# Altium PCB DZ_V5.1.PcbDoc (part 1 of 2)
Units mm, origin at the board's own origin, x right, y up, seen from the top; angles counter-clockwise.
Board outline 105.4 x 126 mm, 4 copper layers (Top Layer, TOP, Mid-Layer 1, INT1, Mid-Layer 2, INT2, Bottom Layer, Bottom); 225 components, 158 nets, 762 pads, 182 vias.
Unrouted connection lines stored in the file: 2.
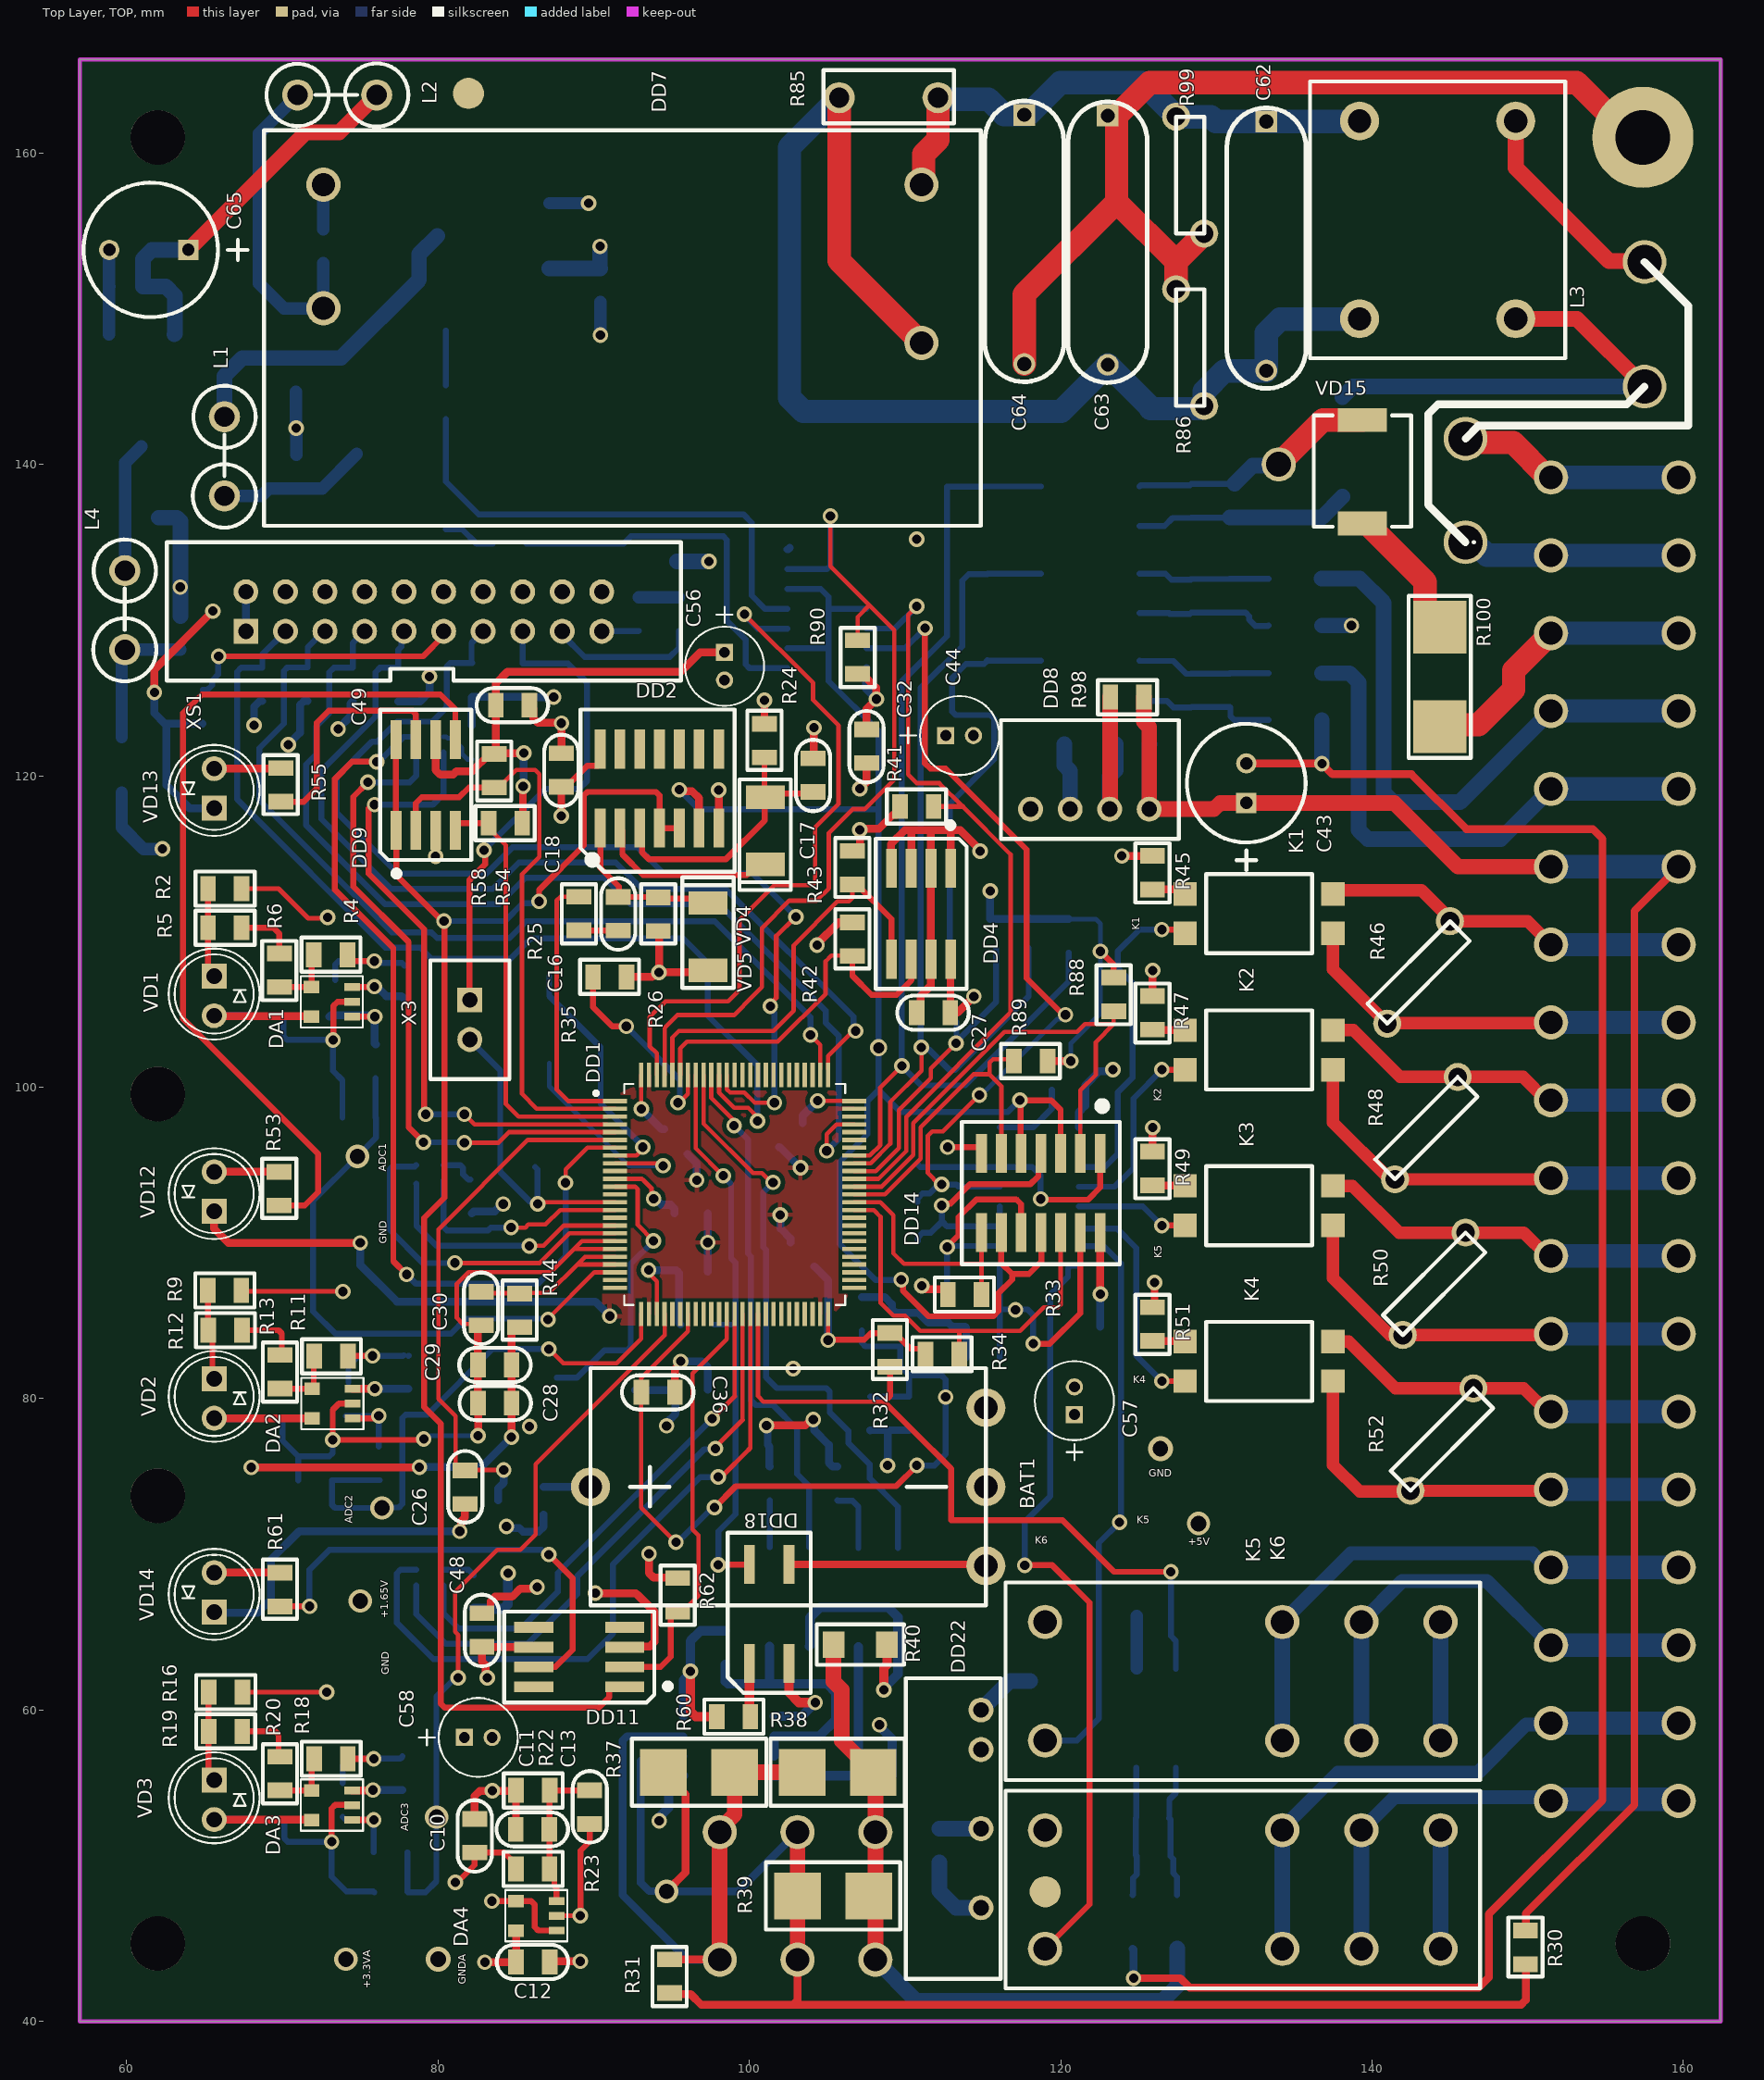
[diagram p0: Top Layer, TOP view]
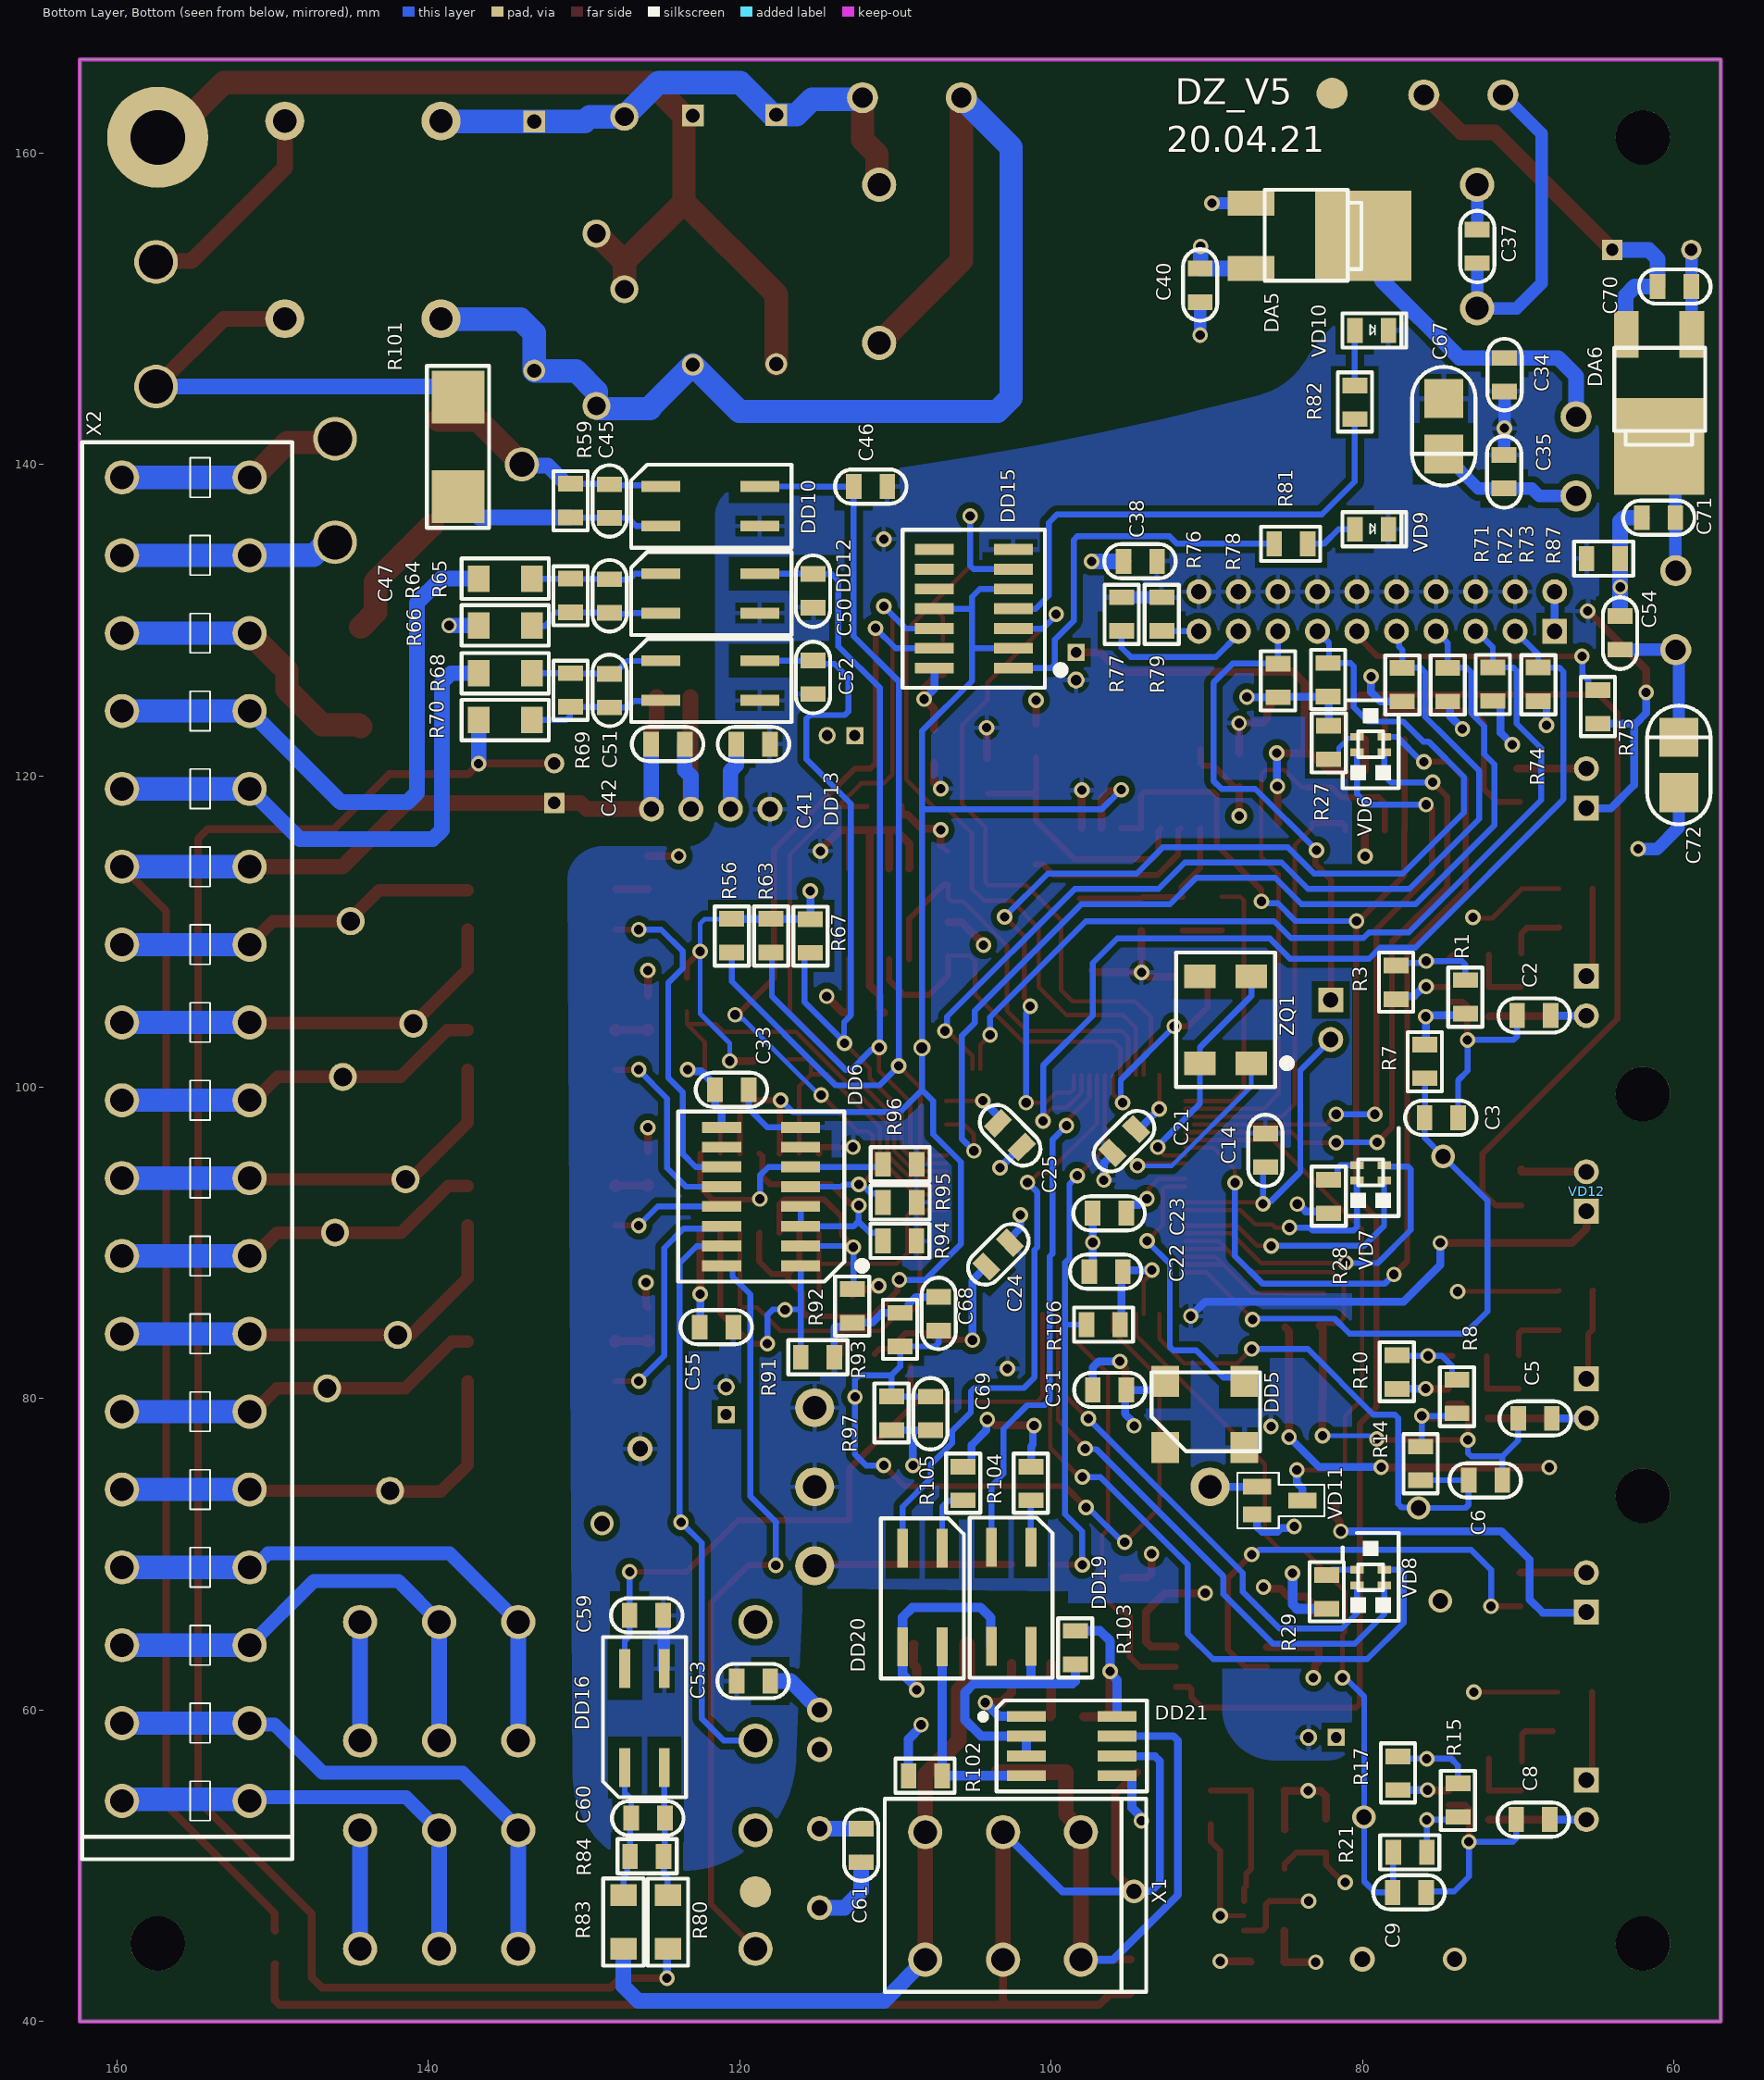
[diagram p1: Bottom Layer, Bottom view, seen from below]
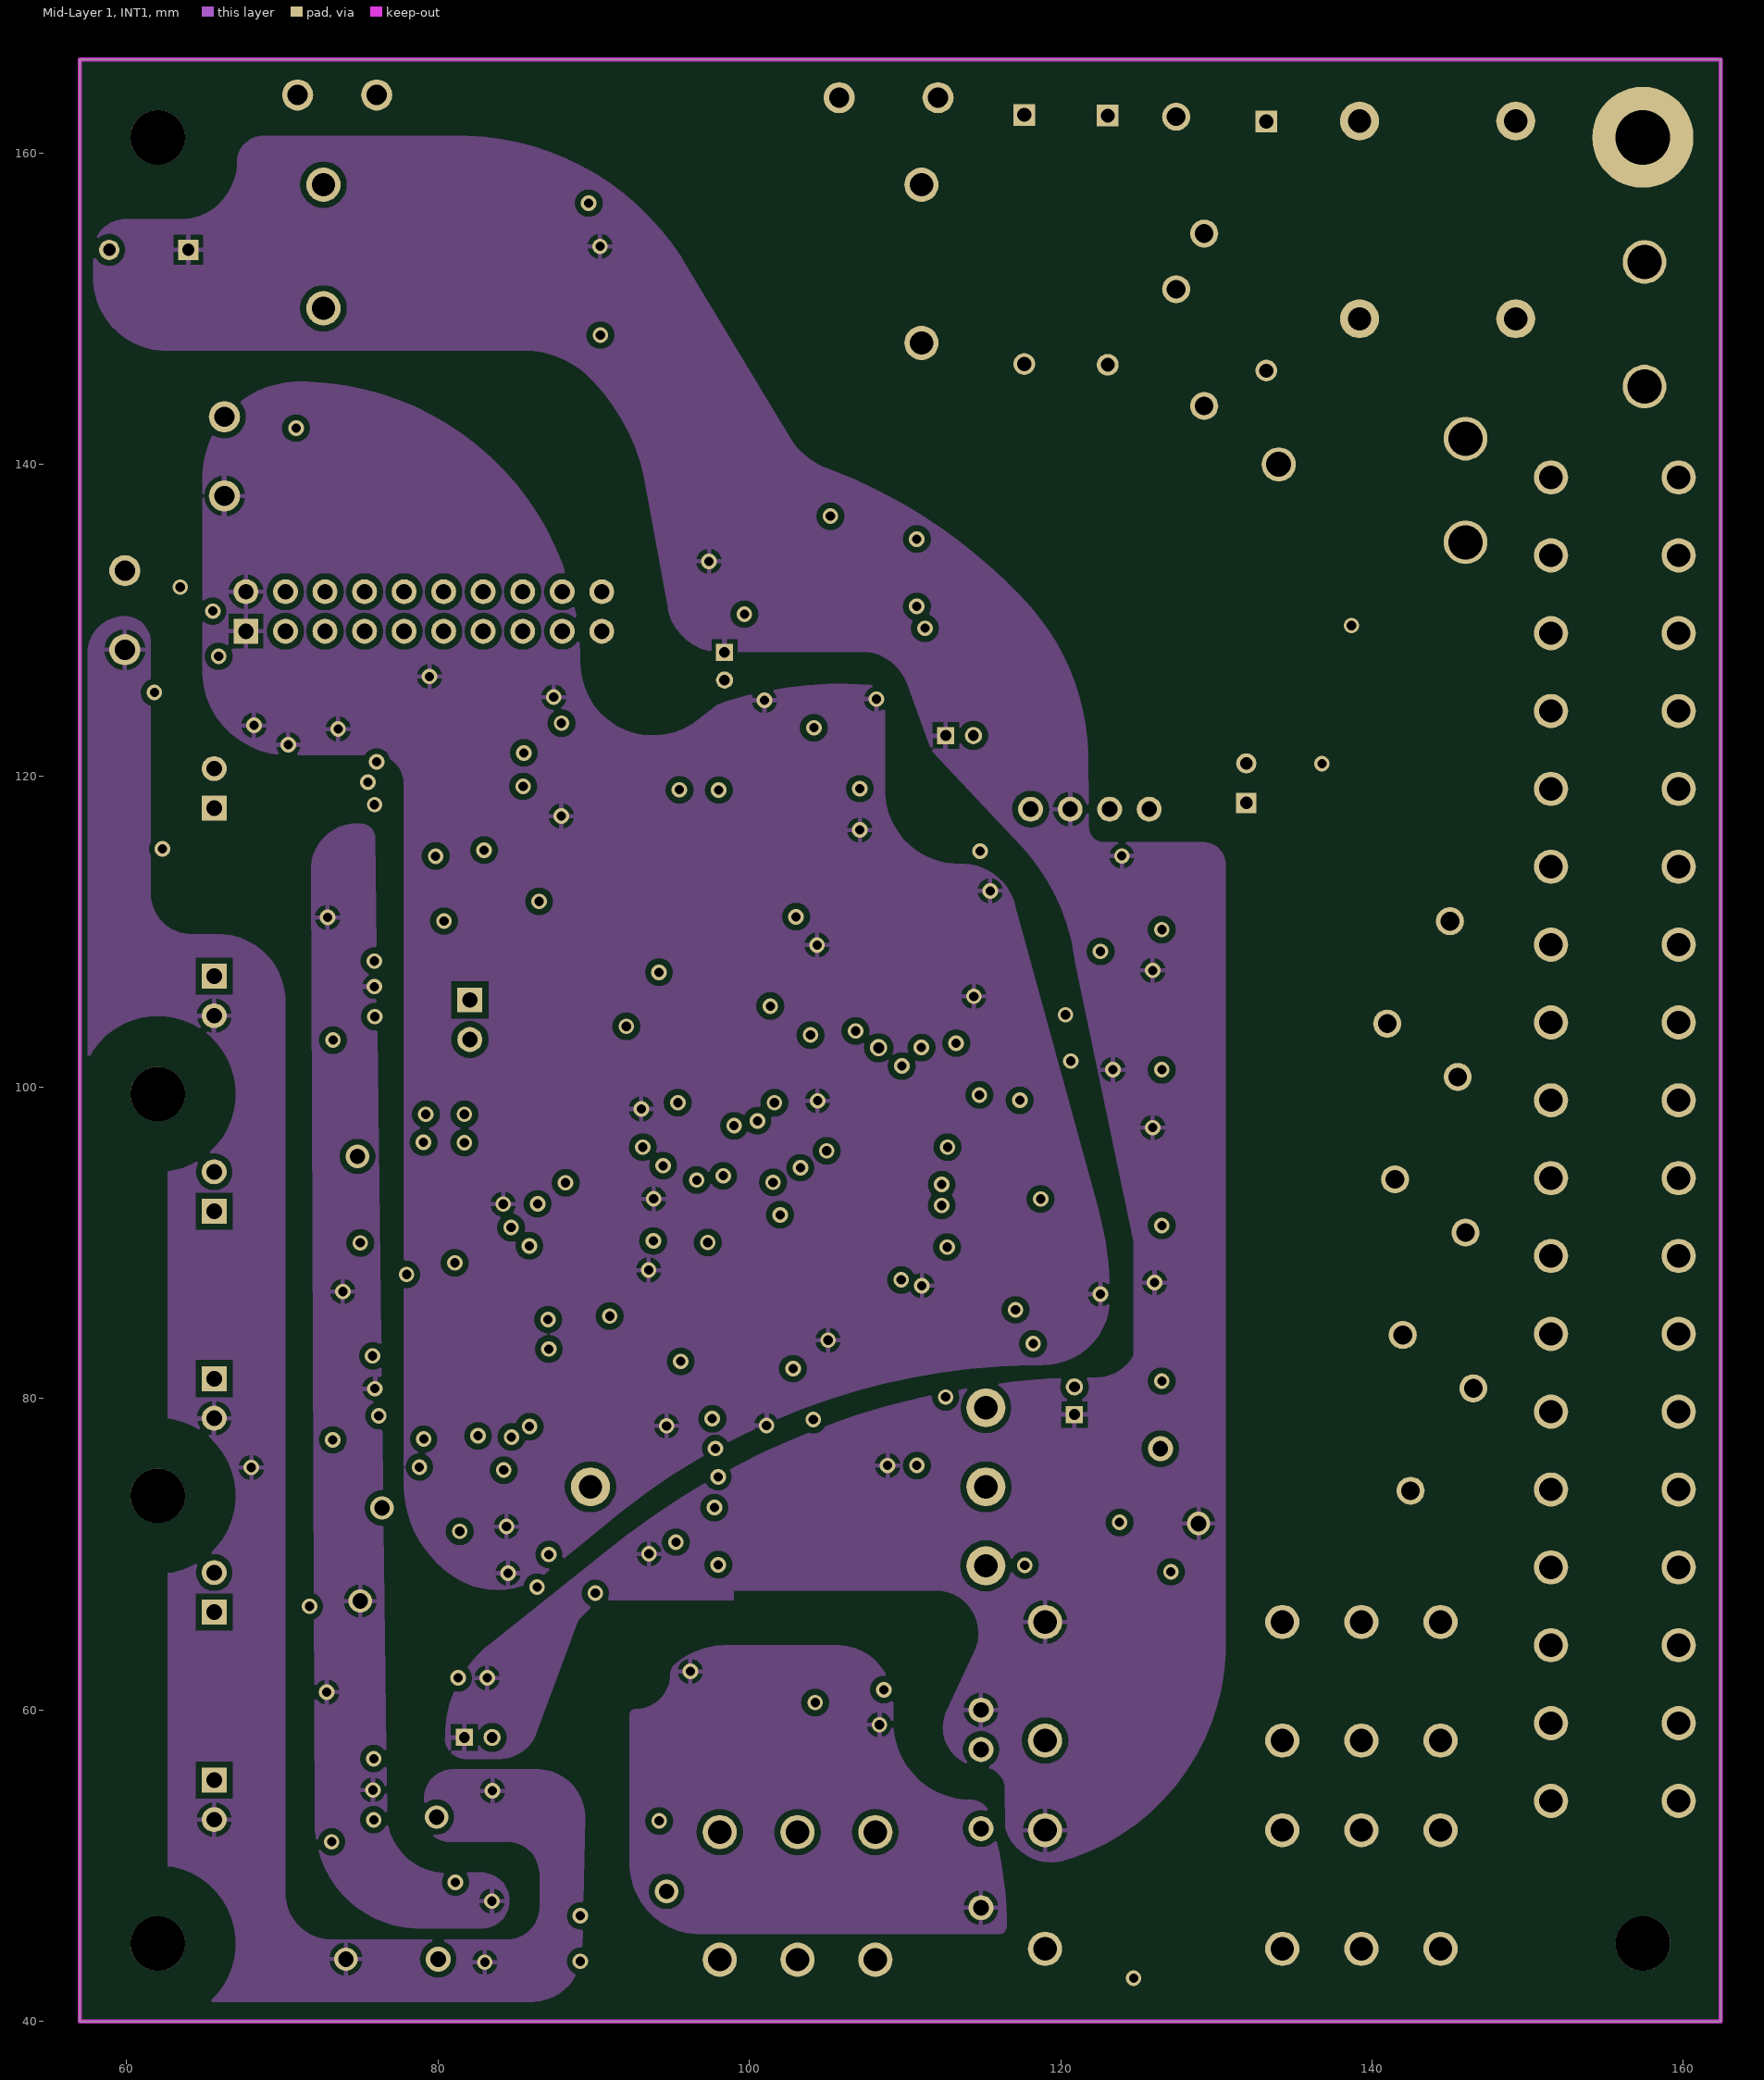
[diagram p2: Mid-Layer 1, INT1]
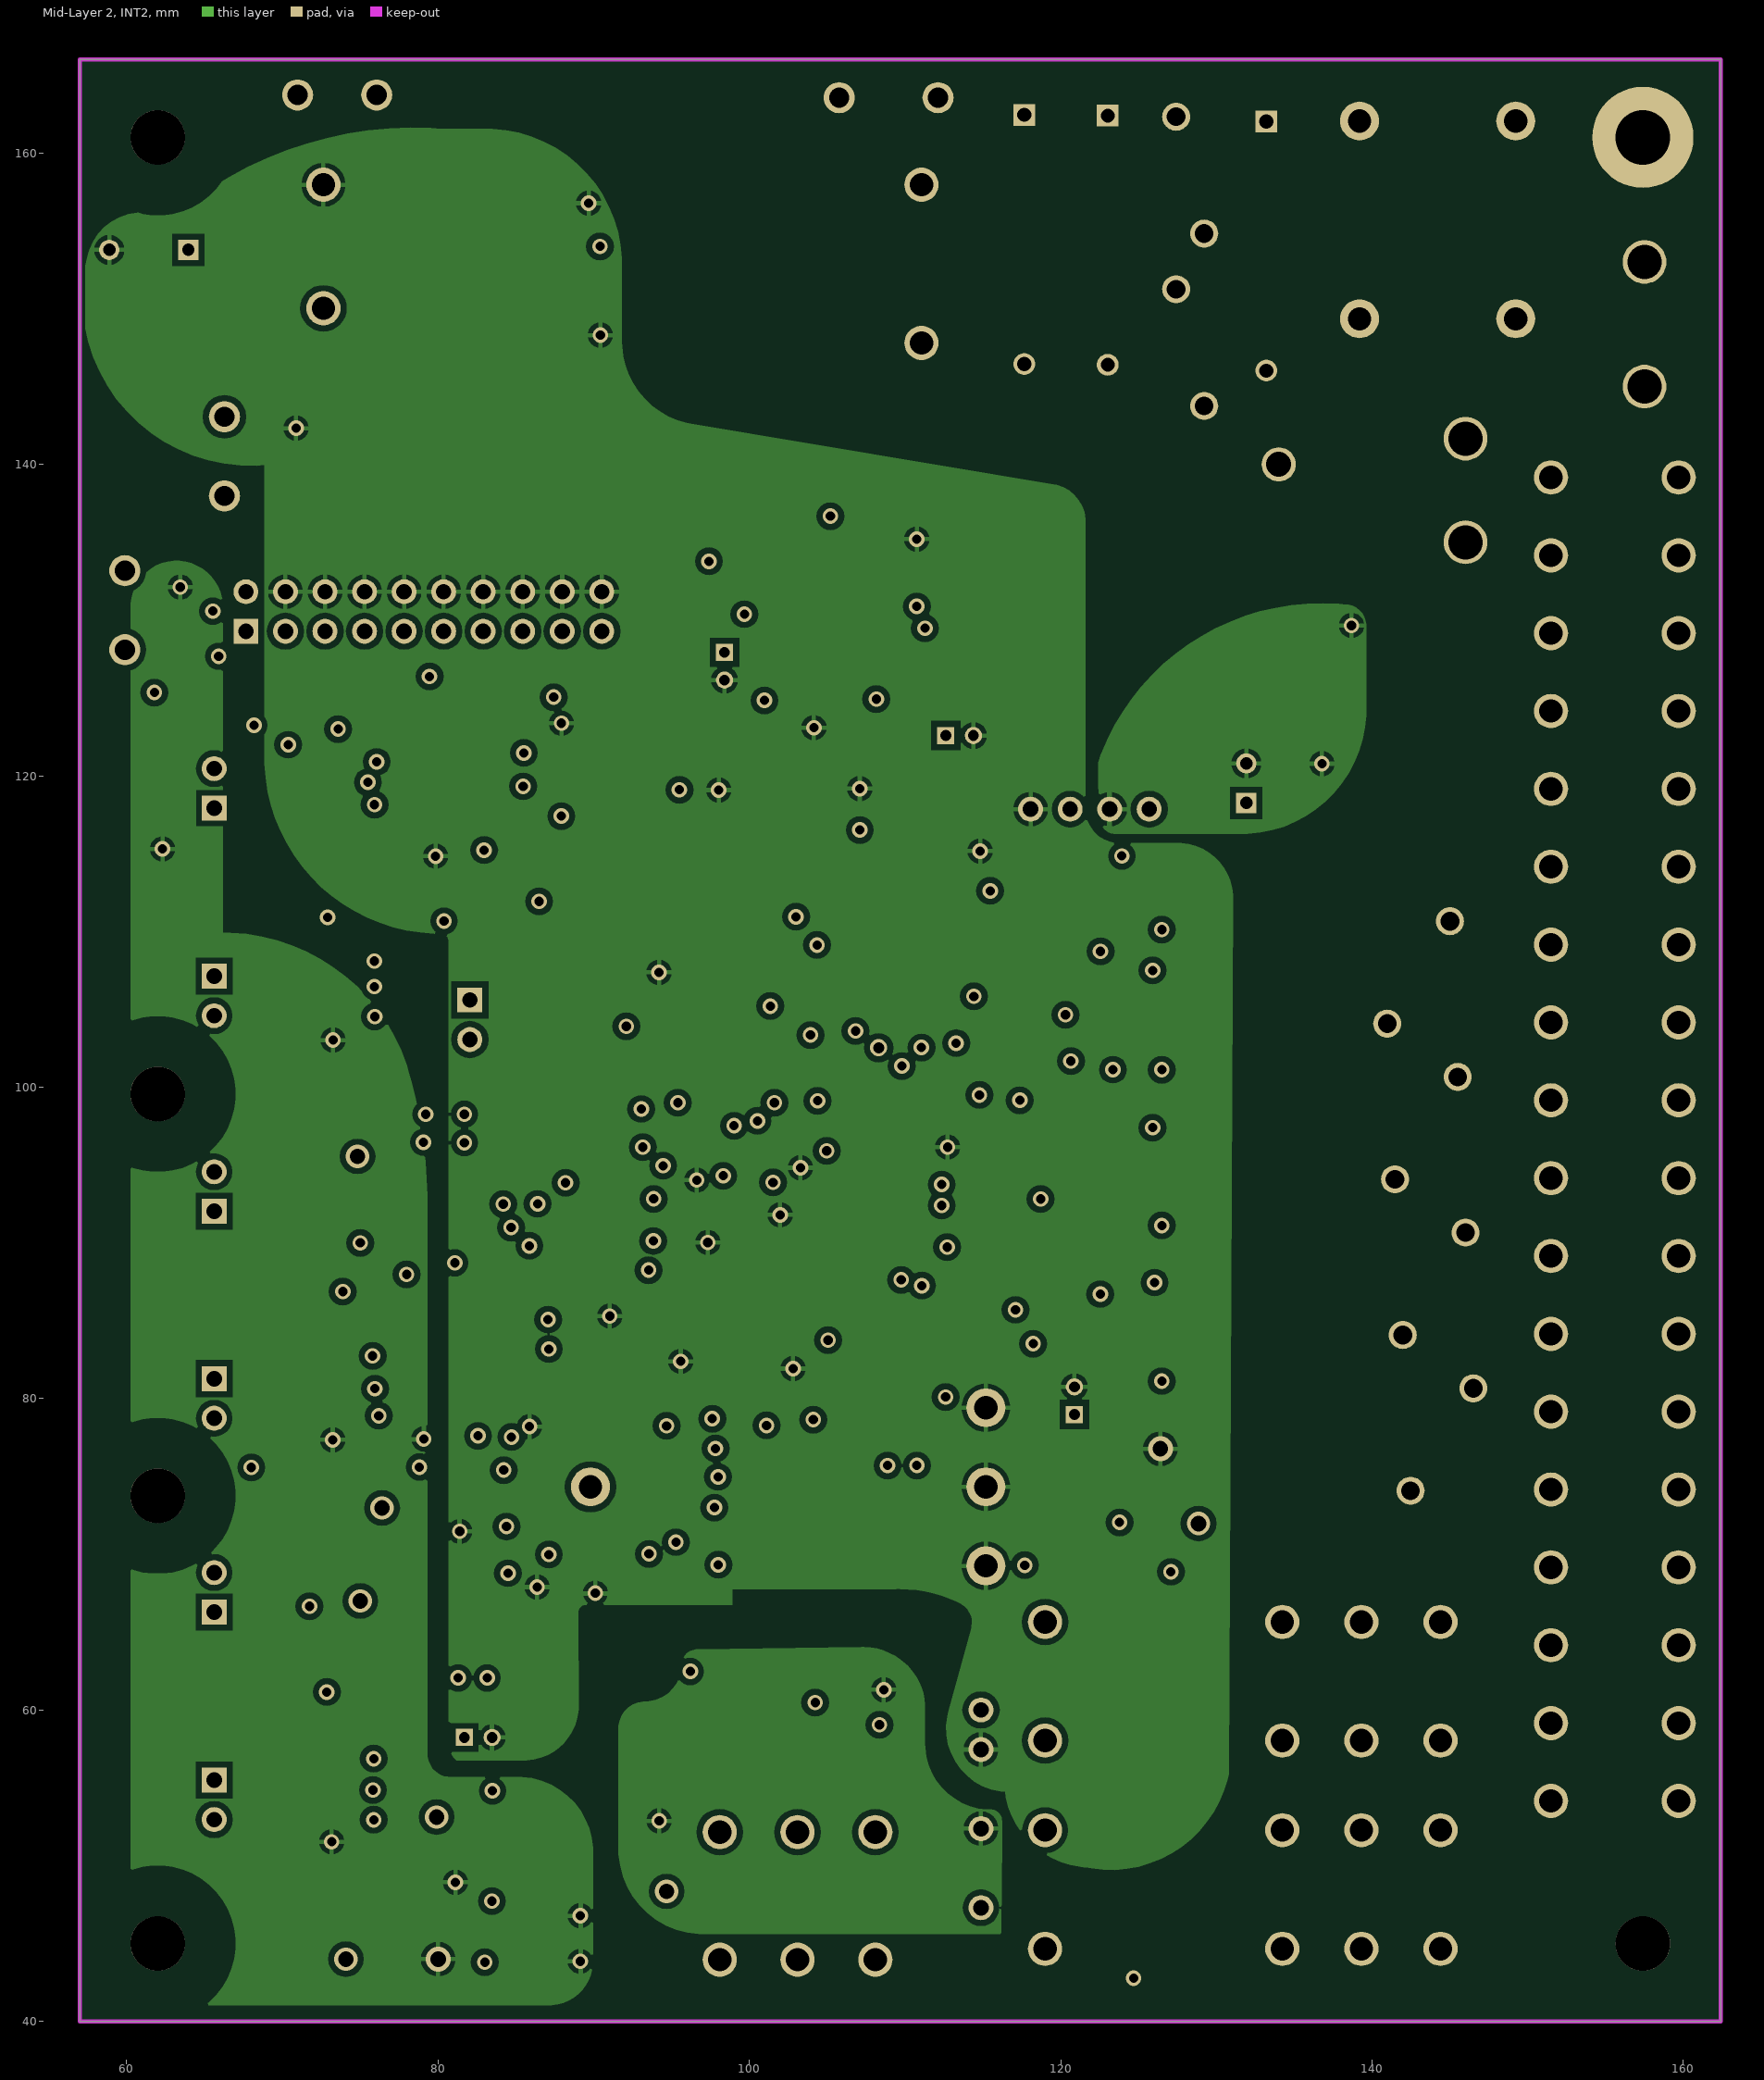
[diagram p3: Mid-Layer 2, INT2]

## Layer stack, top to bottom
Top Solder, Top Mask: solder mask 0.0102, Solder Resist, Dk 3.5
Top Layer, TOP: signal copper 0.0356
Dielectric 1: dielectric 0.32, FR-4, Dk 4.8
Mid-Layer 1, INT1: signal copper 0.0356
Dielectric2: dielectric 0.32, FR-4, Dk 4.8
Mid-Layer 2, INT2: signal copper 0.0356
Dielectric3: dielectric 0.32, FR-4, Dk 4.8
Bottom Layer, Bottom: signal copper 0.0356
Bottom Solder, Bot Mask: solder mask 0.0102, Solder Resist, Dk 3.5

## Board outline
56.99,40 56.99,166 162.39,166 162.39,40

## Design rules (kind name [scope] priority, off if disabled: settings)
Clearance MidL [OnLayer('Mid-Layer 2, INT2')] p1: gap=0.381 ignorepadtopadclearanceinfootprint=FALSE except(0.22: Arc-Fill Arc-Poly Arc-Region Track-Fill Track-Poly Track-Region; 0.229: SMDPad-Fill SMDPad-Poly SMDPad-Region)
Clearance MidG [OnLayer('Mid-Layer 1, INT1')] p2: gap=0.381 ignorepadtopadclearanceinfootprint=FALSE except(0.22: Arc-Fill Arc-Poly Arc-Region Track-Fill Track-Poly Track-Region; 0.229: SMDPad-Fill SMDPad-Poly SMDPad-Region)
Clearance Bottom [OnLayer('Bottom Layer, Bottom')] p3: gap=0.4 ignorepadtopadclearanceinfootprint=FALSE except(0.35: Fill-Fill Fill-Poly Fill-Region Poly-Poly Poly-Region Region-Region; 0.6: Arc-Arc Arc-Track Track-Track; 0.75: SMDPad-Fill SMDPad-Poly SMDPad-Region)
Clearance Top [OnLayer('Top Layer, TOP')] p4: gap=0.4 ignorepadtopadclearanceinfootprint=FALSE except(0.2: Arc-Fill Arc-Poly Arc-Region Track-Fill Track-Poly Track-Region; 0.25: SMDPad-Fill SMDPad-Poly SMDPad-Region; 0.3: Via-Fill Via-Poly Via-Region Fill-Fill Fill-Poly Fill-Region Poly-Poly Poly-Region Region-Region; 0.6: Arc-Arc Arc-Track Track-Track)
ComponentClearance [All] p1: gap=0 collisioncheckmode=3 verticalgap=0 showdistances=FALSE
PlaneClearance [All] p1: clearance=0.5
PolygonConnect [All] p1: connectstyle=Relief reliefconductorwidth=0.3 reliefentries=4 polygonreliefangle="90 Angle" airgapwidth=0.3
RoutingVias [All] p1: holewidth=0.6 width=1 viastyle="Through Hole" minholewidth=0 minwidth=0 maxholewidth=1.6 maxwidth=2
SolderMaskExpansion [All] p1: expansion=0.102 istentingtop=FALSE
Width [All] p1: maxlimit=2 minlimit=0.2 preferedwidth=0.3
28 further rules are at their usual default settings.

## Components (designator, comment, footprint, x,y, rotation, side; value= is the part's Value field where it differs from the comment)
BAT1 "ER14250-VY_BATT" ER14250-VY_BATT_ER14250-VY_B09_ER14250-VY_BATT_ER14250-VY_B09(Primary) 89.789,74.334 r0 top
C2 "CAP_0805" CAP_0805 70.069,104.599 r180 bottom
C3 "CAP_0805" CAP_0805 73.856,98.034 r0 bottom
C5 "CAP_0805" CAP_0805 69.999,78.729 r180 bottom
C6 "CAP_0805" CAP_0805 71.016,74.75 r0 bottom
C8 "CAP_0805" CAP_0805 70.125,52.959 r180 bottom
C9 "CAP_0805" CAP_0805 75.906,48.284 r0 bottom
C10 "CAP_0805" CAP_0805 82.35,53.009 r270 top
C11 "CAP_0805" CAP_0805 87.149,52.334 r180 top
C12 "CAP_0805" CAP_0805 87.17,43.814 r180 top
C13 "CAP_0805" CAP_0805 89.74,52.675 r90 top
C14 "CAP_0805" CAP_0805 86.233,97.028 r270 bottom
C16 "CAP_0805" CAP_0805 91.566,112.218 r270 top
C17 "CAP_0805" CAP_0805 104.09,121.118 r270 top
C18 "CAP_0805" CAP_0805 87.915,121.443 r270 top
C21 "CAP_0805" CAP_0805 94.54,97.309 r315 bottom
C22 "CAP_0805" CAP_0805 95.391,88.15 r0 bottom
C23 "CAP_0805" CAP_0805 95.175,91.9 r0 bottom
C24 "CAP_0805" CAP_0805 104.166,88.482 r135 bottom
C25 "CAP_0805" CAP_0805 103.415,97.684 r225 bottom
C26 "CAP_0805" CAP_0805 81.74,73.234 r90 top
C27 "CAP_0805" CAP_0805 112.898,104.784 r180 top
C28 "CAP_0805" CAP_0805 82.565,79.709 r0 top
C29 "CAP_0805" CAP_0805 82.556,82.159 r0 top
C30 "CAP_0805" CAP_0805 82.765,84.7 r90 top
C31 "CAP_0805" CAP_0805 97.324,80.559 r180 bottom
C32 "CAP_0805" CAP_0805 107.525,122.975 r270 top
C33 "CAP_0805" CAP_0805 119.431,99.834 r0 bottom
C34 "CAP_0805" CAP_0805 70.875,144.675 r90 bottom
C35 "CAP_0805" CAP_0805 70.9,140.613 r270 bottom
C36 "CAP_0805" CAP_0805 95.209,80.4 r180 top
C37 "CAP_0805" CAP_0805 72.625,155.084 r270 bottom
C38 "CAP_0805" CAP_0805 93.191,133.775 r0 bottom
C40 "CAP_0805" CAP_0805 90.425,150.416 r90 bottom
C41 "CAP_0805" CAP_0805 120.224,122.034 r180 bottom
C42 "CAP_0805" CAP_0805 123.531,122.034 r0 bottom
C43 "CAP100_25V" CAP100_25V 131.918,118.257 r90 top
C44 "CAP10_35V" CAP10_35V_CAP10_35V(Primary)_CAP10_35V_CAP10_35V(Primary)(Primary) 112.612,122.584 r0 top
C45 "CAP_0805" CAP_0805 128.364,136.559 r90 bottom
C46 "CAP_0805" CAP_0805 112.684,138.575 r180 bottom
C47 "CAP_0805" CAP_0805 128.364,130.459 r90 bottom
C48 "CAP_0805" CAP_0805 82.815,66.209 r270 top
C49 "CAP_0805" CAP_0805 85.864,124.538 r180 top
C50 "CAP_0805" CAP_0805 115.29,132.959 r270 bottom
C51 "CAP_0805" CAP_0805 128.364,124.384 r90 bottom
C52 "CAP_0805" CAP_0805 115.29,127.409 r270 bottom
C53 "CAP_0805" CAP_0805 118.042,61.858 r0 bottom
C54 "CAP_0805" CAP_0805 63.45,130.259 r270 bottom
C55 "CAP_0805" CAP_0805 120.415,84.584 r0 bottom
C56 "CAP10_35V" CAP10_35V_CAP10_35V(Primary)_CAP10_35V_CAP10_35V(Primary)(Primary) 98.4,127.925 r270 top
C57 "CAP10_35V" CAP10_35V_CAP10_35V(Primary)_CAP10_35V_CAP10_35V(Primary)(Primary) 120.875,78.975 r90 top
C58 "CAP10_35V" CAP10_35V_CAP10_35V(Primary)_CAP10_35V_CAP10_35V(Primary)(Primary) 81.69,58.234 r0 top
C59 "CAP_0805" CAP_0805 127.075,66.075 r180 bottom
C60 "CAP_0805" CAP_0805 124.809,53.05 r0 bottom
C61 "CAP_0805" CAP_0805 112.2,50.225 r90 bottom
C62 "Comment" CAP_FILTR 133.206,162.025 r270 top
C63 "Comment" CAP_FILTR 123.017,162.4 r270 top
C64 "Comment" CAP_FILTR 117.655,162.45 r270 top
C65 "CAP470_6V" CAP470_6V 63.955,153.775 r180 top
C67 "C_TANTAL" C_TL_B_C_TANTAL(Primary)_C_TL_B_C_TANTAL(Primary)(Primary) 74.775,140.675 r90 bottom
C68 "CAP_0805" CAP_0805 107.225,84.366 r90 bottom
C69 "CAP_0805" CAP_0805 107.75,80.125 r270 bottom
C70 "CAP_0805" CAP_0805 61.034,151.425 r180 bottom
C71 "CAP_0805" CAP_0805 62.059,136.575 r180 bottom
C72 "C_TANTAL" C_TL_B_C_TANTAL(Primary)_C_TL_B_C_TANTAL(Primary)(Primary) 59.675,122.475 r270 bottom
DA1 "AD8628ART_1" SOT_23_5PIN 74.47,104.539 r90 top
DA2 "AD8628ART_1" SOT_23_5PIN 74.51,78.729 r90 top
DA3 "AD8628ART_1" SOT_23_5PIN 74.475,52.939 r90 top
DA4 "AD8628ART_1" SOT_23_5PIN 87.61,45.834 r90 top
DA5 "LM1117_DT" DPAK_CASE369A_13_LM1117_DT(P81_DPAK_CASE369A_13_LM1117_DT(P81(Primary) 87.15,156.775 r270 bottom
DA6 "LM1117_DT" DPAK_CASE369A_13_LM1117_DT(P81_DPAK_CASE369A_13_LM1117_DT(P81(Primary) 58.85,148.35 r0 bottom
DD1 "Comment" *QFP50P1600X1600X160-100N 99.05,93.111 r0 top
DD2 "74HC04_1" SOIC14_1 90.411,116.634 r90 top
DD4 "M24C64-WMN6" SO8 112.934,114.059 r270 top
DD5 "KXO-V97" KXO-V97 92.67,76.859 r180 bottom
DD6 "ULM2003" SOIC16_1 116.085,88.529 r0 bottom
DD7 "IRM-05" IRM-05_IRM-05(Primary)_IRM-05_IRM-05(Primary)(Primary) 111.05,157.96 r270 top
DD8 "P10AU-0524ELF" P10AU-0524 118.06,117.857 r0 top
DD9 "UCC27423" SO8 77.299,116.492 r90 top
DD10 "HMAA2701" HMA2701_HMAA2701(Primary) 125.064,138.584 r180 bottom
DD11 "UCC27423" SO8 91.99,61.494 r180 top
DD12 "HMAA2701" HMA2701_HMAA2701(Primary) 125.064,132.984 r180 bottom
DD13 "HMAA2701" HMA2701_HMAA2701(Primary) 125.064,127.384 r180 bottom
DD14 "74HC08" SOIC14 122.53,95.739 r270 top
DD15 "74HC08" SOIC14 102.435,126.919 r0 bottom
DD16 "HMAA2701" HMA2701_HMAA2701(Primary) 127.39,56.3 r90 bottom
DD18 "HMAA2701" HMA2701_HMAA2701(Primary) 100,63 r90 top
DD19 "HMAA2701" HMA2701_HMAA2701(Primary) 101.3,70.45 r270 bottom
DD20 "HMAA2701" HMA2701_HMAA2701(Primary) 107,70.4 r270 bottom
DD21 "Comment" SO8 101.6,59.59 r180 bottom
DD22 "Comment" P10CU-0512Z 114.875,60 r270 top
K1 "VOR1142B4" SMD-4 127.99,112.415 r0 top
K2 "VOR1142B4" SMD-4 127.99,103.659 r0 top
K3 "VOR1142B4" SMD-4 127.99,93.659 r0 top
K4 "VOR1142B4" SMD-4 127.99,83.659 r0 top
K5 "RT314" RT314 118.99,58.034 r270 top
K6 "RT314" RT314 118.99,44.659 r270 top
L1 "EXCELDR35C" EXCELDR35C 66.275,143.055 r270 top
L2 "EXCELDR35C" EXCELDR35C 70.975,163.725 r0 top
L3 "Comment" DROS_FILTR 139.192,162.05 r270 top
L4 "EXCELDR35C" EXCELDR35C 59.875,133.175 r270 top
R1 "RES_0805" RES_0805 73.39,106.879 r270 bottom
R2 "RES_0805" RES_0805 65.216,112.75 r0 top
R3 "RES_0805" RES_0805 77.84,105.65 r90 bottom
R4 "RES_0805" RES_0805 72.02,108.509 r0 top
R5 "RES_0805" RES_0805 65.22,110.239 r0 top
R6 "RES_0805" RES_0805 69.8,108.589 r270 top
R7 "RES_0805" RES_0805 75.99,102.734 r270 bottom
R8 "RES_0805" RES_0805 73.93,81.218 r270 bottom
R9 "RES_0805" RES_0805 65.2,86.95 r0 top
R10 "RES_0805" RES_0805 77.79,80.625 r90 bottom
R11 "RES_0805" RES_0805 72.05,82.719 r0 top
R12 "RES_0805" RES_0805 65.241,84.389 r0 top
R13 "RES_0805" RES_0805 69.84,82.798 r270 top
R14 "RES_0805" RES_0805 76.265,76.918 r270 bottom
R15 "RES_0805" RES_0805 73.865,55.293 r270 bottom
R16 "RES_0805" RES_0805 65.266,61.15 r0 top
R17 "RES_0805" RES_0805 77.715,54.859 r90 bottom
R18 "RES_0805" RES_0805 72.036,56.869 r0 top
R19 "RES_0805" RES_0805 65.255,58.629 r0 top
R20 "RES_0805" RES_0805 69.835,56.998 r270 top
R21 "RES_0805" RES_0805 75.865,50.859 r0 bottom
R22 "RES_0805" RES_0805 85.011,54.834 r0 top
R23 "RES_0805" RES_0805 85.001,49.794 r0 top
R24 "RES_0805" RES_0805 100.964,121.175 r90 top
R25 "RES_0805" RES_0805 89.039,112.234 r270 top
R26 "RES_0805" RES_0805 94.141,110.034 r90 top
R27 "RES_0805" RES_0805 82.171,123.218 r270 bottom
R28 "RES_0805" RES_0805 82.171,91.9 r90 bottom
R29 "RES_0805" RES_0805 82.298,66.5 r90 bottom
R30 "RES_0805" RES_0805 149.85,43.671 r90 top
R31 "RES_0805" RES_0805 94.875,43.975 r270 top
R32 "RES_0805" RES_0805 109.025,82.05 r90 top
R33 "RES_0805" RES_0805 114.909,86.675 r180 top
R34 "RES_0805" RES_0805 113.475,82.85 r180 top
R35 "RES_0805" RES_0805 92.114,107.084 r180 top
R37 "VAR1" VAR 99.05,56 r180 top
R38 "VAR1" VAR 107.95,56 r180 top
R39 "VAR1" VAR 107.662,48.059 r180 top
R40 "RES_1206" RES_1206 108.825,64.2 r180 top
R41 "RES_0805" RES_0805 111.825,118.025 r180 top
R42 "RES_0805" RES_0805 106.614,108.425 r90 top
R43 "RES_0805" RES_0805 106.614,113.009 r90 top
R44 "RES_0805" RES_0805 85.24,84.584 r90 top
R45 "RES_0805" RES_0805 125.89,114.859 r270 top
R46 "VARISTOR" Varistor_4500 145,110.659 r225 top
R47 "RES_0805" RES_0805 125.89,105.859 r270 top
R48 "VARISTOR" Varistor_4500 145.5,100.659 r225 top
R49 "RES_0805" RES_0805 125.89,95.859 r270 top
R50 "VARISTOR" Varistor_4500 146,90.659 r225 top
R51 "RES_0805" RES_0805 125.89,85.859 r270 top
R52 "VARISTOR" Varistor_4500 146.5,80.659 r225 top
R53 "RES_0805" RES_0805 69.79,92.4 r90 top
R54 "RES_0805" RES_0805 83.6,121.409 r270 top
R55 "RES_0805" RES_0805 69.89,118.334 r90 top
R56 "RES_0805" RES_0805 120.515,110.809 r270 bottom
R58 "RES_0805" RES_0805 85.399,116.959 r180 top
R59 "RES_0805" RES_0805 130.864,138.759 r270 bottom
R60 "RES_0805" RES_0805 97.9,59.575 r0 top
R61 "RES_0805" RES_0805 69.845,66.654 r90 top
R62 "RES_0805" RES_0805 95.39,68.475 r270 top
R63 "RES_0805" RES_0805 117.99,110.809 r270 bottom
R64 "RES_1206" RES_1206 136.768,132.659 r180 bottom
R65 "RES_0805" RES_0805 130.864,132.659 r270 bottom
R66 "RES_1206" RES_1206 136.768,129.659 r180 bottom
R67 "RES_0805" RES_0805 115.465,110.793 r270 bottom
R68 "RES_1206" RES_1206 136.768,126.584 r180 bottom
R69 "RES_0805" RES_0805 130.864,126.584 r270 bottom
R70 "RES_1206" RES_1206 136.768,123.584 r180 bottom
R71 "RES_0805" RES_0805 77.44,126.934 r270 bottom
R72 "RES_0805" RES_0805 74.525,126.934 r270 bottom
R73 "RES_0805" RES_0805 71.625,126.959 r270 bottom
R74 "RES_0805" RES_0805 68.7,126.95 r270 bottom
R75 "RES_0805" RES_0805 64.875,123.35 r90 bottom
R76 "RES_0805" RES_0805 85.425,127.2 r270 bottom
R77 "RES_0805" RES_0805 95.465,131.468 r270 bottom
R78 "RES_0805" RES_0805 82.204,125.085 r90 bottom
R79 "RES_0805" RES_0805 92.89,131.468 r270 bottom
R80 "RES_1206" RES_1206 124.621,44.671 r90 bottom
R81 "RES_0805" RES_0805 83.516,134.9 r0 bottom
R82 "RES_0805" RES_0805 80.49,142.909 r90 bottom
R83 "RES_1206" RES_1206 127.475,44.675 r90 bottom
R84 "RES_0805" RES_0805 127.05,50.6 r180 bottom
R85 "Comment" VARISTOR 112.114,163.55 r180 top
R86 "VARISTOR" Varistor_4500 129.212,143.75 r90 top
R87 "RES_0805" RES_0805 65.609,133.95 r180 bottom
R88 "RES_0805" RES_0805 123.4,107.034 r270 top
R89 "RES_0805" RES_0805 119.15,101.675 r180 top
R90 "RES_0805" RES_0805 106.95,128.7 r270 top
R91 "RES_0805" RES_0805 116.084,82.65 r180 bottom
R92 "RES_0805" RES_0805 112.775,87.034 r270 bottom
R93 "RES_0805" RES_0805 109.7,83.35 r90 bottom
R94 "RES_0805" RES_0805 110.809,90.125 r180 bottom
R95 "RES_0805" RES_0805 110.8,92.6 r180 bottom
R96 "RES_0805" RES_0805 110.8,95.05 r180 bottom
R97 "RES_0805" RES_0805 110.25,77.975 r90 bottom
R98 "RES_0805" RES_0805 123.181,125.05 r0 top
R99 "VARISTOR" Varistor_4500 129.212,154.825 r90 top
R100 "Comment" RES_2515 144.35,123.15 r90 top
R101 "Comment" RES_2515 138.1,144.325 r270 bottom
R102 "RES_0805" RES_0805 107,55.775 r0 bottom
R103 "RES_0805" RES_0805 98.45,65.084 r270 bottom
R104 "RES_0805" RES_0805 101.3,73.466 r90 bottom
R105 "RES_0805" RES_0805 105.65,73.466 r90 bottom
R106 "RES_0805" RES_0805 97.734,84.75 r180 bottom
VD1 "FOTODIOD" VD_3MM 65.615,107.129 r270 top
VD2 "FOTODIOD" VD_3MM 65.615,81.279 r270 top
VD3 "FOTODIOD" VD_3MM 65.615,55.499 r270 top
VD4 "VD_GORIZONT" BYM1001 101.014,114.309 r90 top
VD5 "VD_VERTICAL" BYM1001 97.341,111.827 r270 top
VD6 "RGB" RGB 80.35,121.5 r180 bottom
VD7 "RGB" RGB 80.35,94 r180 bottom
VD8 "RGB" RGB 80.35,68 r180 bottom
VD9 "KPT2012_SVD" SVD_0805 80.489,135.832 r180 bottom
VD10 "KPT2012_SVD" SVD_0805 80.489,148.6 r180 bottom
VD11 "BAT54C" SOT_23_1 86.771,74.339 r270 bottom
VD12 "LED_3MM" VD_3MM 65.615,92.024 r90 bottom
VD13 "LED_3MM" VD_3MM 65.615,117.919 r90 top
VD14 "LED_3MM" VD_3MM 65.615,66.284 r90 top
VD15 "Comment" 10BQ015_10BQ015(Primary) 139.375,136.2 r90 top
X1 "SPT-3" "SPT 2,5/3-V-5,0" 98.09,52.159 r0 bottom
X2 "SPT-18" "SPT 2,5/18-V-5,0" 151.49,54.159 r90 bottom
X3 "JL2" JL2 82.04,105.599 r90 top
XS1 "BH20" BH20 67.655,129.281 r180 top
ZQ1 "MC306" MC306_MC306(Primary)_MC306_MC306(Primary)(Primary) 87.14,101.534 r90 bottom

## Footprints (in the part's own frame and the unit in brackets; to place one, negate y for a bottom-side part, rotate by r counter-clockwise, add the part's x,y. Pads: shape width x height; smd on the part's side, far side on the other; paste and mask are expansions set on the pad)
10BQ015_10BQ015(Primary) [mm]
  rect 1.54x3.14 smd: Anod(0,0) Catod(6.65,0)
  silkscreen extent -0.21,-3.13 6.94,3.13
*QFP50P1600X1600X160-100N [mm]
  rect 1.56x0.28 smd: 1(-7.68,6) 2(-7.68,5.5) 3(-7.68,5) 4(-7.68,4.5) 5(-7.68,4) 6(-7.68,3.5) 7(-7.68,3) 8(-7.68,2.5) 9(-7.68,2) 10(-7.68,1.5) 11(-7.68,1) 12(-7.68,0.5) 13(-7.68,0) 14(-7.68,-0.5) 15(-7.68,-1) 16(-7.68,-1.5) 17(-7.68,-2) 18(-7.68,-2.5) 19(-7.68,-3) 20(-7.68,-3.5) 21(-7.68,-4) 22(-7.68,-4.5) 23(-7.68,-5) 24(-7.68,-5.5) 25(-7.68,-6) 51(7.68,-6) 52(7.68,-5.5) 53(7.68,-5) 54(7.68,-4.5) 55(7.68,-4) 56(7.68,-3.5) 57(7.68,-3) 58(7.68,-2.5) 59(7.68,-2) 60(7.68,-1.5) 61(7.68,-1) 62(7.68,-0.5) 63(7.68,0) 64(7.68,0.5) 65(7.68,1) 66(7.68,1.5) 67(7.68,2) 68(7.68,2.5) 69(7.68,3) 70(7.68,3.5) 71(7.68,4) 72(7.68,4.5) 73(7.68,5) 74(7.68,5.5) 75(7.68,6)
  rect 0.28x1.56 smd: 26(-6,-7.68) 27(-5.5,-7.68) 28(-5,-7.68) 29(-4.5,-7.68) 30(-4,-7.68) 31(-3.5,-7.68) 32(-3,-7.68) 33(-2.5,-7.68) 34(-2,-7.68) 35(-1.5,-7.68) 36(-1,-7.68) 37(-0.5,-7.68) 38(0,-7.68) 39(0.5,-7.68) 40(1,-7.68) 41(1.5,-7.68) 42(2,-7.68) 43(2.5,-7.68) 44(3,-7.68) 45(3.5,-7.68) 46(4,-7.68) 47(4.5,-7.68) 48(5,-7.68) 49(5.5,-7.68) 50(6,-7.68) 76(6,7.68) 77(5.5,7.68) 78(5,7.68) 79(4.5,7.68) 80(4,7.68) 81(3.5,7.68) 82(3,7.68) 83(2.5,7.68) 84(2,7.68) 85(1.5,7.68) 86(1,7.68) 87(0.5,7.68) 88(0,7.68) 89(-0.5,7.68) 90(-1,7.68) 91(-1.5,7.68) 92(-2,7.68) 93(-2.5,7.68) 94(-3,7.68) 95(-3.5,7.68) 96(-4,7.68) 97(-4.5,7.68) 98(-5,7.68) 99(-5.5,7.68) 100(-6,7.68)
  silkscreen extent -9.02,-7.1 7.1,7.1
BH20 [mm]
  rect 1.6x1.6 hole 1: 1(0,0)
  round 1.6 hole 1: 2(0,-2.54) 3(-2.54,0) 4(-2.54,-2.54) 5(-5.08,0) 6(-5.08,-2.54) 7(-7.62,0) 8(-7.62,-2.54) 9(-10.16,0) 10(-10.16,-2.54) 11(-12.7,0) 12(-12.7,-2.54) 13(-15.24,0) 14(-15.24,-2.54) 15(-17.78,0) 16(-17.78,-2.54) 17(-20.32,0) 18(-20.32,-2.54) 19(-22.86,0) 20(-22.86,-2.54)
  silkscreen extent -27.94,-5.72 5.08,3.18
BYM1001 [mm]
  rect 1.5x2.5 smd: 1(0,0) 2(4.318,0)
  silkscreen extent -1.65,-1.65 5.46,1.65
C_TL_B_C_TANTAL(Primary)_C_TL_B_C_TANTAL(Primary)(Primary) [mm]
  rect 2.5x2.5 smd: Minus(3.556,0) Plus(0,0)
  silkscreen extent -2.03,-2.03 5.59,2.03
CAP10_35V_CAP10_35V(Primary)_CAP10_35V_CAP10_35V(Primary)(Primary) [mm]
  round 1.1 hole 0.7: Minus(1.778,0)
  rect 1.1x1.1 hole 0.7: plus(0,0)
  silkscreen extent -2.92,-2.54 3.43,2.54
CAP100_25V [mm]
  rect 1.3x1.3 hole 0.8: 1(0,0)
  round 1.3 hole 0.8: 2(2.54,0)
  silkscreen extent -4.32,-3.81 5.08,3.81
CAP470_6V [mm]
  rect 1.3x1.3 hole 0.8: 1(0,0)
  round 1.3 hole 0.8: 2(5.08,0)
  silkscreen extent -3.81,-4.32 6.73,4.32
CAP_0805 [mm]
  rect 1x1.6 smd: 1(0,0) 2(2.159,0)
  silkscreen extent -1.2,-1.1 3.4,1.1
CAP_FILTR [mm]
  rect 1.4x1.4 hole 0.9: 1(0,0)
  round 1.4 hole 0.9: 2(16.002,0)
  silkscreen extent -0.89,-2.54 17.15,2.54
DPAK_CASE369A_13_LM1117_DT(P81_DPAK_CASE369A_13_LM1117_DT(P81(Primary) [mm]
  rect 1.6x3 smd: GND(0,0) Vin(4.2,0)
  rect 5.8x6.2 smd: Vout(2.1,7.2)
  silkscreen extent -0.86,0.86 4.98,7.09
DROS_FILTR [mm]
  round 2.5 hole 1.5: 1(0,0) 2(12.7,0) 3(12.7,10.033) 4(0,10.033)
  silkscreen extent -2.54,-3.18 15.24,13.21
ER14250-VY_BATT_ER14250-VY_B09_ER14250-VY_BATT_ER14250-VY_B09(Primary) [mm]
  round 2.5 hole 1.5: Minus(25.4,0) Plus(0,0)
  silkscreen extent 0,-7.62 25.4,7.62
EXCELDR35C [mm]
  round 2 hole 1.3: 1(0,0) 2(5.08,0)
  silkscreen extent -2,-2.03 7.11,2.03
HMA2701_HMAA2701(Primary) [mm]
  rect 2.5x0.7 smd: 1(0,0) 2(0,-2.54) 3(6.35,0) 4(6.35,-2.54)
  silkscreen extent -1.91,-3.94 8.38,1.4
IRM-05_IRM-05(Primary)_IRM-05_IRM-05(Primary)(Primary) [mm]
  round 2.2 hole 1.5: GND(0,-38.417) LINE(0,0) NEUTRAL(10.16,0) Vcc(7.938,-38.417)
  silkscreen extent -3.49,-42.23 21.91,3.81
JL2 [mm]
  rect 1.6x1.6 hole 1: 1(0,0)
  round 1.6 hole 1: 2(-2.54,0)
  silkscreen extent -5.08,-2.54 2.54,2.54
KXO-V97 [mm]
  rect 1.8x2 smd: 1(0,0) 2(5.08,0) 3(5.08,4.255) 4(0,4.255)
  silkscreen extent -0.88,-0.24 6.09,4.83
MC306_MC306(Primary)_MC306_MC306(Primary)(Primary) [mm]
  rect 1.5x2 smd: 1(0,0) 2(0,3.302) 2_1(5.588,0) 3(5.588,3.302)
  silkscreen extent -1.52,-2.54 7.11,4.83
P10AU-0524 [mm]
  round 1.6 hole 1: 1(0,0) 2(2.54,0) 3(5.08,0) 4(7.62,0)
  silkscreen extent -1.91,-1.91 9.53,5.71
P10CU-0512Z [mm]
  round 1.6 hole 1: 1(0,0) 2(2.54,0) 3(7.62,0) 5(12.7,0)
  silkscreen extent -2.03,-4.83 17.27,1.27
RES_0805 [mm]
  rect 1x1.6 smd: 1(0,0) 2(2.159,0)
  silkscreen extent -0.8,-1.1 3,1.1
RES_1206 [mm]
  rect 1.4x1.7 smd: 1(0,0) 2(3.429,0)
  silkscreen extent -1.1,-1.3 4.5,1.3
RES_2515 [mm]
  rect 3.4x3.4 smd: 1(0,0) 2(6.4,0)
  silkscreen extent -2,-2 8.4,2
RGB [mm]
  rect 0.85x0.5 smd: 1(0,0) 2(1.75,0) 3(1.75,1) 4(0,1)
  silkscreen extent 0.08,-0.3 1.68,1.35
RT314 [mm]
  round 2.2 hole 1.5: 1(0,0) 2(-7.62,0) 3(-7.62,15.24) 4(0,20.32) 5(-7.62,25.4) 6(0,15.24) 7(-7.62,20.32) 8(0,25.4)
  silkscreen extent -10.16,-2.54 2.54,27.94
SMD-4 [mm]
  rect 1.5x1.5 smd: 1(0,0) 2(0,-2.54) 3(9.5,-2.54) 4(9.5,0)
  silkscreen extent 1.35,-3.81 8.15,1.27
SO8 [mm]
  rect 2.5x0.7 smd: 1(0,0) 2(0,-1.27) 3(0,-2.54) 4(0,-3.81) 5(5.842,-3.81) 6(5.842,-2.54) 7(5.842,-1.27) 8(5.842,0)
  silkscreen extent -2.9,-4.83 7.75,1.02
SOIC14 [mm]
  rect 2.5x0.7 smd: 1(0,0) 2(0,-1.27) 3(0,-2.54) 4(0,-3.81) 5(0,-5.08) 6(0,-6.35) 7(0,-7.62) 8(5.08,-7.62) 9(5.08,-6.35) 10(5.08,-5.08) 11(5.08,-3.81) 12(5.08,-2.54) 13(5.08,-1.27) 14(5.08,0)
  silkscreen extent -3.3,-8.89 7.11,1.27
SOIC14_1 [mm]
  rect 2.5x0.7 smd: 1(0,0) 2(0,-1.27) 3(0,-2.54) 4(0,-3.81) 5(0,-5.08) 6(0,-6.35) 7(0,-7.62) 8(5.08,-7.62) 9(5.08,-6.35) 10(5.08,-5.08) 11(5.08,-3.81) 12(5.08,-2.54) 13(5.08,-1.27) 14(5.08,0)
  silkscreen extent -2.79,-8.64 7.62,1.27
SOIC16_1 [mm]
  rect 2.5x0.7 smd: 1(0,0) 2(0,-1.27) 3(0,-2.54) 4(0,-3.81) 5(0,-5.08) 6(0,-6.35) 7(0,-7.62) 8(0,-8.89) 9(5.08,-8.89) 10(5.08,-7.62) 11(5.08,-6.35) 12(5.08,-5.08) 13(5.08,-3.81) 14(5.08,-2.54) 15(5.08,-1.27) 16(5.08,0)
  silkscreen extent -4.19,-9.91 7.87,1.02
SOT_23_1 [mm]
  rect 1x1.8 smd: 1(0,0) 2(1.778,0) 3(0.889,2.921)
  silkscreen extent -0.89,-1.27 2.67,4.32
SOT_23_5PIN [mm]
  rect 0.5x1 smd: 1(0,0) 2(0.95,0) 3(1.9,0)
  rect 0.8x1 smd: 4(1.9,2.6) 5(0,2.6)
  silkscreen extent -0.7,-0.7 2.6,3.3
"SPT 2,5/3-V-5,0" [mm]
  round 2.2 hole 1.5: 1(0,0) 2(5,0) 3(10,0) 4(0,8.2) 5(5,8.2) 6(10,8.2)
  silkscreen extent -4.2,-2.13 12.6,10.26
"SPT 2,5/18-V-5,0" [mm]
  round 2.2 hole 1.5: 1(0,0) 2(5,0) 3(10,0) 4(15,0) 5(20,0) 6(25,0) 7(30,0) 8(35,0) 9(40,0) 10(45,0) 11(50,0) 12(55,0) 13(60,0) 14(65,0) 15(70,0) 16(75,0) 17(80,0) 18(85,0) 19(0,8.2) 20(5,8.2) 21(10,8.2) 22(15,8.2) 23(20,8.2) 24(25,8.2) 25(30,8.2) 26(35,8.2) 27(40,8.2) 28(45,8.2) 29(50,8.2) 30(55,8.2) 31(60,8.2) 32(65,8.2) 33(70,8.2) 34(75,8.2) 35(80,8.2) 36(85,8.2)
  silkscreen extent -3.74,-2.75 87.26,10.76
SVD_0805 [mm]
  rect 1x1.6 smd: 1(0,0) 2(2.159,0)
  silkscreen extent -0.8,-1.1 3.3,1.1
VAR [mm]
  rect 3x3 smd: 1(0,0) 2(4.572,0)
  silkscreen extent -2.03,-2.16 6.6,2.16
VARISTOR [mm]
  round 2 hole 1.3: 1(0,0) 2(6.35,0)
  silkscreen extent -1.02,-1.78 7.37,1.65
Varistor_4500 [mm]
  round 1.8 hole 1.2: 1(0,0) 2(7.5,1.8)
  silkscreen extent 0,0 7.5,1.8
VD_3MM [mm]
  rect 1.6x1.6 hole 1: 1(0,0)
  round 1.6 hole 1: 2(2.54,0)
  silkscreen extent -1.77,-2.92 4.06,2.92

## Free pads (board coordinates)
  round 3.5 hole 3.5 mask+0.102: 0(61.99,45) 0(61.99,73.759) 0(61.99,99.562) 0(61.99,161) 0(157.39,45)
  round 6.5 hole 3.5: 0(157.39,161)
  round 2 smd mask+0.102: 1(81.95,163.825) 1(119,48.325)
  round 2 smd far side mask+0.102: 1(81.95,163.825) 1(119,48.325)
  round 2.2 hole 1.6: 7(134,140)
  round 2.8 hole 2.2: 7(146,135) 7(146,141.65) 7(157.5,145) 7(157.5,153)
  round 2.5 hole 1.5: Minus(115.189,69.259) Minus(115.189,79.409)

## Via types
v1: diameter 1, hole 0.6, Top Layer, TOP to Bottom Layer, Bottom, tented both sides, 172 vias
v2: diameter 1.5, hole 1, Top Layer, TOP to Bottom Layer, Bottom, tented both sides, 7 vias
v3: diameter 1.6, hole 1, Top Layer, TOP to Bottom Layer, Bottom, 2 vias
v4: diameter 1.1, hole 0.7, Top Layer, TOP to Bottom Layer, Bottom, tented both sides, 1 vias

## Nets (pads, with @x,y where several pads share a name; then routed paths per layer and width w, separated by ;. In a path a pad name is that pad's centre, name@x,y a point inside that pad or via, vN(x,y) a via of type N, cw(c..) or ccw(c..) an arc to the next point about the centre after c; other vN are vias at no path point)
+1.65V: DA1.3 DA2.3 DA3.3 DA4.1 DA4.4 R2.2 R3.1 R9.2 R10.1 R16.2 R17.1 | length 34.6
  Top Layer, TOP w0.3: R9.2@67.359,86.95 67.434,86.875 v1(73.875,86.875) ; R2.2@67.375,112.75 69.75,112.75 71.65,110.85 72.85,110.85 v1(72.9,110.9) ; R16.2@67.425,61.15 v1(72.85,61.15)
  Top Layer, TOP w0.381: DA1.3@74.47,106.439 v1@75.895,106.439 ; v1(83.455,47.724) 83.46,47.729 85.005,47.729 85.008,47.725 85.985,47.725 86.208,47.502 86.208,46.057 86.431,45.834 DA4.1@87.61,45.834
  Top Layer, TOP w0.5: DA3.3@74.475,54.839 v1@75.814,54.834 ; DA2.3@74.51,80.629 75.935,80.629 v1(75.94,80.634) ; v1@75.895,106.439 v1(75.915,106.459)
  Bottom Layer, Bottom w0.5: v1(75.815,54.859) R17.1@77.715,54.859 ; v1(75.94,80.634) 75.944,80.629 R10.1@78.085,80.629
  Bottom Layer, Bottom w0.508: v1(75.915,106.459) 76.009,106.365 76.16,106.365 76.677,105.848 77.641,105.848 R3.1@77.84,105.65
  other v2: 75,67
+3.3V: C18.2 C21.1 C22.1 C23.1 C24.1 C25.1 C27.1 C31.2 C32.1 C35.2 C55.2 C67.Plus DD1.11 DD1.28 DD1.50 DD1.75 DD1.100 DD2.14 DD4.8 DD5.4 DD14.14 DD15.14 L1.2 R24.2 R27.1 R28.1 R29.1 R32.2 R33.2 R34.2 R41.2 R42.2 R43.2 R56.1 R63.1 R67.1 R71.2 R72.2 R73.2 R74.2 R76.2 R78.1 R88.1 R89.1 R90.2 R104.2 R105.2 R106.2 VD11.2 XS1.1 XS1.2 | length 149
  Top Layer, TOP w0.279: DD1.11@91.37,94.111 93.11,94.111 93.455,93.766 ; v1(93.05,98.6) DD1.100@93.05,100.791 ; v1@93.334,88.25 v1(93.523,88.25) 93.523,88.061 94.05,87.534 DD1.28@94.05,85.431 ; v1(104.375,99.125) 104.382,99.118 106.723,99.118 DD1.75@106.73,99.111
  Top Layer, TOP w0.281: v1(105.05,83.75) DD1.50@105.05,85.431
  Top Layer, TOP w0.3: 93.198,94.023 93.712,93.509 93.712,92.959 v1(93.846,92.825) ; R43.2@106.614,115.168 106.741,115.168 R43.2@107.091,115.518
  Top Layer, TOP w0.381: C18.2@87.915,119.284 88.215,119.284 89.585,120.654 90.252,120.654 90.4,120.802 DD2.14@90.4,121.714 ; v1(105.05,83.75) 105.075,83.775 107.375,83.775 107.809,84.209 R32.2@109.025,84.209 109.325,84.209 110.334,83.2 111.006,83.2 111.316,82.89 R34.2@111.316,82.85 ; v1(122.55,108.725) 123.4,107.875 R88.1@123.4,107.034
  Top Layer, TOP w0.5: v1(87.915,117.41) C18.2@87.915,119.284 ; R24.2@100.964,123.334 v1(100.965,124.841) ; v1(101.1,78.275) 103.59,78.275 103.965,78.65 v1(104.1,78.65) ; 105.734,110.584 R42.2@106.614,110.584 ; DD4.8@112.934,108.217 112.916,108.199 112.916,104.802 112.914,104.8 113.382,104.8 114.415,105.832 v1(114.415,105.834)
  Top Layer, TOP w0.508: v1@104.343,109.193 105.734,110.584 ; R90.2@106.95,126.541 107.25,126.541 108.137,125.654 108.137,124.938 v1(108.15,124.925) 107.525,124.3 C32.1@107.525,122.975 ; R43.2@107.091,115.518 v1(107.091,116.518) 107.185,116.612 108.334,116.612 109.201,117.479 109.42,117.479 109.666,117.725 R41.2@109.666,118.025 ; v1(111.075,87.253) 111.311,87.018 112.504,87.018 112.75,86.772 R33.2@112.75,86.675 ; R89.1@119.15,101.675 v1(120.65,101.675) ; DD14.14@122.53,90.659 122.535,90.654 v1@122.535,86.714 ; v1@122.535,86.714 v1(122.54,86.709) v1@122.535,86.714
  Bottom Layer, Bottom w0.254: C55.2@122.54,84.618 C55.2@122.574,84.584
  Bottom Layer, Bottom w0.3: R76.2@85.425,125.041 R76.2@85.434,125.05 ; R56.1@120.507,110.801 122.249,110.801 122.55,110.5 v1(122.55,108.725) 122.55,104.725 120.65,102.825 v1(120.65,101.675)
  Bottom Layer, Bottom w0.5: XS1.1@67.655,129.281 XS1.2@67.655,131.821 ; v1(68.175,123.239) 68.175,124.441 68.525,124.791 R74.2@68.7,124.791 ; v1(70.371,121.998) 71.131,122.759 71.131,124.55 71.381,124.8 R73.2@71.625,124.8 ; v1(73.575,123) 73.575,123.025 74.375,123.825 74.375,124.625 R72.2@74.525,124.775 ; R71.2@77.44,124.775 78.85,124.775 79.45,125.375 v1(79.45,126.375) ; R27.1@82.171,123.218 82.171,125.051 R78.1@82.204,125.085 82.226,125.063 85.403,125.063 R76.2@85.425,125.041 ; v1(84.39,71.784) 84.485,71.688 85.212,71.688 85.45,71.45 86.457,71.45 86.775,71.768 86.775,72.557 VD11.2@86.771,72.561 ; R76.2@85.434,125.05 v1(87.425,125.05) ; C22.1@95.291,88.25 C22.1@95.391,88.15 95.483,88.058 95.483,84.842 R106.2@95.575,84.75 ; v1(101.1,78.275) 101.175,78.2 101.175,77.025 101.275,76.925 101.275,75.65 R104.2@101.3,75.625 ; v1(104.1,78.65) 104.171,78.579 104.171,77.954 105.1,77.025 105.1,75.875 105.35,75.625 R105.2@105.65,75.625 ; C24.1@104.166,88.482 105.05,87.598 v1(105.05,83.75) ; DD15.14@107.515,126.919 107.515,126.844 107.49,126.819 107.49,125.585 v1(108.15,124.925)
  Bottom Layer, Bottom w0.508: R28.1@82.171,91.9 82.296,92.025 83.639,92.025 84.104,92.49 v1(84.183,92.49) ; DD5.4@92.67,80.539 95.145,80.539 95.25,80.433 95.25,79.014 94.675,78.439 v1(94.675,78.25) ; v1(93.05,98.6) 94.341,97.309 C21.1@94.54,97.309 ; v1(93.523,88.25) C22.1@95.291,88.25 ; v1(93.846,92.825) 93.979,92.825 94.358,92.446 94.929,92.446 95.175,92.2 C23.1@95.175,91.9 ; C25.1@103.415,97.684 103.415,98.165 v1(104.375,99.125) ; v1(115.465,112.609) R67.1@115.465,110.793 115.473,110.801 R56.1@120.507,110.801 ; R63.1@117.94,110.859 R63.1@117.99,110.809 ; C55.2@122.54,84.618 v1(122.54,86.709)
  Bottom Layer, Bottom w0.635: R29.1@82.298,66.5 84.2,66.5 84.49,66.79 v1(84.49,68.784)
  Bottom Layer, Bottom w0.8: L1.2@66.28,137.97 L1.2@66.275,137.975 68.65,137.975 69.125,138.45 70.896,138.45 C35.2@70.9,138.454 72.554,138.454 C67.Plus@74.775,140.675
  other v1: 104.343,109.132
+3.3V_DE: DD19.1 R104.1 | length 3
  Bottom Layer, Bottom w0.381: DD19.1@101.3,70.45 R104.1@101.3,73.466
+3.3V_TX: DD20.1 R105.1 | length 4.2
  Bottom Layer, Bottom w0.381: R105.1@105.65,73.466 105.691,73.425 106.625,73.425 107,73.05 DD20.1@107,70.4
+3.3VA: C2.2 C5.2 C8.2 C10.1 C11.2 C12.2 C28.2 C29.2 C54.2 C72.Plus DA1.5 DA2.5 DA3.5 DA4.5 L4.2 R22.1 R44.1 VD1.2 VD2.2 VD3.2 | length 70.2
  Top Layer, TOP w0.5: VD3.2@65.615,52.959 65.625,52.949 71.865,52.949 DA3.5@71.875,52.939 ; VD2.2@65.615,78.739 65.62,78.734 71.905,78.734 DA2.5@71.91,78.729 ; VD1.2@65.615,104.589 65.64,104.564 71.845,104.564 DA1.5@71.87,104.539 ; v1@68,75.55 68.025,75.575 78.775,75.575 v1(78.8,75.6) ; C10.1@82.35,53.009 82.35,54.475 82.675,54.8 83.481,54.8 v1(83.49,54.809) 84.986,54.809 R22.1@85,54.823 ; v1(83,43.8) 84.996,43.8 C12.2@85.011,43.814 DA4.5@85.01,45.833 ; v1(84.715,77.534) 84.719,77.538 84.719,79.329 84.724,79.334 84.719,79.338 84.719,81.904 84.715,81.909 84.715,82.234 84.715,83.98 84.715,84.334 R44.1@84.965,84.584 ; C11.2@84.99,52.334 85,52.344 R22.1@85,54.823 ; R22.1@85.011,54.834 R22.1@85,54.823
  Bottom Layer, Bottom w0.5: VD3.2@65.615,52.959 C8.2@67.966,52.959 ; VD2.2@65.615,78.739 67.83,78.739 C5.2@67.84,78.729 ; VD1.2@65.615,104.589 67.9,104.589 C2.2@67.91,104.599 ; v1@79.1,75.6 82.779,75.6 v1(84.715,77.534) v1(84.715,77.534)
  Bottom Layer, Bottom w0.8: C72.Plus@59.675,122.475 59.675,127.895 59.878,128.097 63.447,128.097 C54.2@63.45,128.1
  other v1: 68,75.575
  other v2: 74.075,44
+3.3VA_LM: C71.2 DA6.Vout L4.1 | length 8.4
  Bottom Layer, Bottom w0.8: L4.1@59.875,133.175 59.888,133.187 59.888,136.562 C71.2@59.9,136.575 59.9,140.1 DA6.Vout@60.95,141.15
+5V: C33.2 C38.2 C40.2 C41.1 C44.plus C48.2 C49.2 C53.1 C56.plus C57.plus C58.plus C65.1 C69.2 C70.1 DA5.Vin DA6.Vin DD6.9 DD8.2 DD9.6 DD11.6 DD22.1 K5.2 K6.2 L2.2 R45.1 R47.1 R49.1 R51.1 R54.1 R58.1 R62.1 R97.1 | length 99
  Top Layer, TOP w0.5: DD9.6@79.839,122.334 79.839,120.368 80.132,120.075 80.966,120.075 81.182,120.29 82.181,120.29 83.3,121.409 R54.1@83.6,121.409 R54.1@83.63,121.439 ; v1(83.15,62.059) 83.054,62.155 83.054,62.871 82.815,63.11 C48.2@82.815,64.05 82.823,64.042 86.14,64.042 DD11.6@86.148,64.034 ; R58.1@85.399,116.959 85.449,117.01 85.449,119.272 85.46,119.283 v1(85.46,119.322) ; v1(85.506,121.47) 85.475,121.439 R54.1@83.63,121.439 ; v1(93.55,70.025) 93.55,68.793 93.843,68.5 95.365,68.5 R62.1@95.39,68.475 ; C56.plus@98.4,127.925 96.825,127.925 95.575,126.675 84.45,126.675 83.705,125.93 C49.2@83.705,124.538 83.705,121.514 R54.1@83.63,121.439 ; v1(123.925,114.85) 123.929,114.854 125.885,114.854 R45.1@125.89,114.859 ; R51.1@125.89,85.859 126.025,85.994 v1(126.025,87.45) ; R49.1@125.89,95.859 125.9,95.869 v1(125.9,97.4) ; R47.1@125.89,105.859 125.9,105.869 v1(125.9,107.5)
  Top Layer, TOP w1: C65.1@63.955,153.775 71.505,161.325 73.655,161.325 L2.2@76.055,163.725
  Bottom Layer, Bottom w0.5: v1(85.46,119.322) 85.483,119.344 85.483,121.447 v1(85.506,121.47) ; C69.2@107.75,77.966 107.755,77.97 108.875,77.97 ; v1(108.875,75.7) 108.875,77.97 ; R97.1@110.25,77.975 110.246,77.97 108.875,77.97 ; DD6.9@121.165,97.419 121.165,98.39 121.575,98.8 121.575,99.819 C33.2@121.59,99.834 121.59,100.134 122.485,101.029 123.254,101.029 v1(123.35,101.125)
  Bottom Layer, Bottom w1: DA6.Vin@63.05,148.35 63.1,148.4 63.1,150.839 62.514,151.425 C70.1@61.034,151.425 61.034,153.198 61.611,153.775 C65.1@63.955,153.775 ; DA5.Vin@87.15,152.575 90.125,152.575 C40.2@90.4,152.575 ; v1(90.4,154) C40.2@90.4,152.575 ; C40.2@90.425,152.575 C40.2@90.4,152.575 ; C38.2@95.35,133.775 v1@97.159,133.775 ; DD22.1@114.875,60 116.733,61.858 C53.1@118.042,61.858 ; C41.1@120.224,122.034 120.224,120.676 120.6,120.3 DD8.2@120.6,117.857
  other v1: 97.4,133.775
  other v2: 128.85,71.975
+5V_Anode: DD18.1 R60.2 | length 3.4
  Top Layer, TOP w0.6: DD18.1@100,63 100,59.634 R60.2@100.059,59.575
+5V_ISO: C61.1 DD21.8 DD22.5 R60.1 R102.2 R103.1 | length 20.5
  Top Layer, TOP w0.6: v1(96.2,62.475) 96.2,59.926 96.551,59.575 R60.1@97.9,59.575
  Bottom Layer, Bottom w0.6: DD21.8@95.758,59.59 95.758,61.925 96.2,62.367 v1(96.2,62.475) 96.2,64.425 96.859,65.084 R103.1@98.45,65.084 ; v1(108.35,59.05) 108.35,58.942 109.159,58.133 R102.2@109.159,55.775
  Bottom Layer, Bottom w1: C61.1@112.2,50.225 112.2,48.375 113.275,47.3 DD22.5@114.875,47.3
+24V: C42.2 C43.1 DD8.4 R30.2 R98.2 X2.13 X2.31 | length 119.8
  Top Layer, TOP w0.5: R30.2@149.85,45.83 149.875,45.855 149.875,46.925 156.85,53.9 156.85,111.319 X2.31@159.69,114.159
  Top Layer, TOP w1: R98.2@125.334,125.05 125.334,123.466 125.68,123.12 DD8.4@125.68,117.857 129.832,117.857 130.232,118.257 C43.1@131.918,118.257 131.925,118.25 141.425,118.25 145.516,114.159 X2.13@151.49,114.159
  Bottom Layer, Bottom w1: DD8.4@125.68,117.857 125.685,117.862 125.685,122.029 C42.2@125.69,122.034
  Bottom Layer, Bottom w1.5: X2.13@151.49,114.159 X2.31@159.69,114.159
A: DD21.6 R30.1 R31.2 R37.2 R39.2 X1.2 X1.5 | length 100.3
  Top Layer, TOP w0.5: R37.2@94.478,56 95.9,54.578 95.9,49.575 v2(94.675,48.35) ; R31.2@94.875,41.816 94.941,41.75 96.225,41.75 96.915,41.06 102.797,41.06 102.811,41.075 ; X1.5@103.09,43.959 103.09,41.353 102.811,41.075 ; R30.1@149.85,43.671 149.875,43.646 149.875,41.368 149.582,41.075 102.811,41.075
  Top Layer, TOP w1: X1.5@103.09,43.959 R39.2@103.09,48.059 X1.2@103.09,52.159
  Bottom Layer, Bottom w0.5: DD21.6@95.758,57.025 93.318,57.025 93.025,56.732 93.025,48.9 93.564,48.361 94.664,48.361 v2(94.675,48.35) 99.281,48.35 X1.2@103.09,52.159
A1: DD6.5 DD15.13 R95.1 | length 55.2
  Top Layer, TOP w0.279: v1(112.35,93.75) 112.186,93.75 111.461,94.475 111.461,96.886 111.736,97.161 112.436,97.161 v1(114.775,99.5)
  Top Layer, TOP w0.381: v1(111.275,129.475) 111.275,120.8 111.62,120.455 112.603,120.455 117.8,115.259 117.8,107 120.152,104.648 v1(120.3,104.648)
  Bottom Layer, Bottom w0.3: v1(114.775,99.5) 114.9,99.5 116.975,101.575
  Bottom Layer, Bottom w0.305: 116.976,101.575 119.768,104.367 120.121,104.367 120.3,104.546 v1(120.3,104.648)
  Bottom Layer, Bottom w0.381: DD15.13@107.515,128.189 109.989,128.189 v1(111.275,129.475) ; R95.1@110.8,92.6 110.8,92.861 111.11,93.171 111.576,93.171 112.037,93.632 112.232,93.632 v1(112.35,93.75) 113.3,93.75 113.441,93.609 DD6.5@116.085,93.609
A2: DD6.6 DD14.1 R96.1 | length 16.1
  Top Layer, TOP w0.381: v1(118.705,92.82) 118.75,92.775 121.75,92.775 122.53,93.555 DD14.1@122.53,95.739
  Bottom Layer, Bottom w0.381: R96.1@110.8,95.05 110.971,94.879 DD6.6@116.085,94.879 118.171,94.879 118.7,94.35 118.7,92.825 v1(118.705,92.82)
A3: DD6.3 DD6.4 DD14.4 R94.1 | length 16.9
  Top Layer, TOP w0.381: v1(112.35,92.4) 112.468,92.518 112.918,92.518 114.181,93.781 118.056,93.781 118.5,94.225 118.502,94.225 118.56,94.283 118.56,95.579 DD14.4@118.72,95.739
  Bottom Layer, Bottom w0.381: R94.1@110.809,90.125 110.809,90.331 111.119,90.64 111.64,90.64 112.375,91.375 ; v1(112.35,92.4) 112.375,92.375 112.375,91.375 ; DD6.4@116.085,92.339 DD6.3@116.085,91.069 113.331,91.069 112.681,91.069 112.375,91.375
A5: DD6.2 DD14.10 R92.1 | length 14.8
  Top Layer, TOP w0.381: v1(112.7,89.725) 112.7,89.759 113.44,90.5 113.44,91.653 114.587,92.8 117.133,92.8 117.212,92.721 117.45,92.483 DD14.10@117.45,90.659
  Bottom Layer, Bottom w0.381: R92.1@112.775,87.034 112.7,87.109 v1(112.7,89.725) 112.774,89.799 DD6.2@116.085,89.799
A6: DD6.1 DD14.13 R91.1 | length 19.1
  Top Layer, TOP w0.381: v1(118.225,83.525) 119.3,83.525 121.26,85.485 DD14.13@121.26,90.659
  Bottom Layer, Bottom w0.381: 116.075,85.718 116.075,88.519 DD6.1@116.085,88.529 ; R91.1@116.084,82.65 116.079,82.655 116.079,85.715 116.094,85.73 116.751,85.73 116.781,85.7 v1(117.09,85.7) ; v1@117.075,85.73 117.87,85.73 118.225,85.375 v1(118.225,83.525)
Anod: R100.2 VD15.Anod | length 8.4
  Top Layer, TOP w1.5: VD15.Anod@139.775,136.075 143.4,132.45 143.4,130.5 R100.2@144.35,129.55
B: DD21.7 R31.1 R37.1 R38.2 X1.1 X1.4 | length 41.9
  Top Layer, TOP w0.5: R31.1@94.875,43.975 94.883,43.967 98.081,43.967 X1.4@98.09,43.959
  Top Layer, TOP w1: X1.4@98.09,43.959 X1.1@98.09,52.159 98.09,52.339 99.05,53.299 R37.1@99.05,56 R38.2@103.378,56
  Bottom Layer, Bottom w0.5: DD21.7@95.758,58.32 92.143,58.32 91.85,58.027 91.85,48.125 96.016,43.959 X1.4@98.09,43.959
DE: DD1.91 DD19.2 | length 33.6
  Top Layer, TOP w0.279: DD1.91@97.55,100.791 97.55,99.298 98.897,97.951 98.962,97.886 98.979,97.833 v1(99.013,97.527)
  Bottom Layer, Bottom w0.381: v1(99.013,97.527) 99.9,96.639 99.9,89.322 100.081,89.141 100.081,79.9 100.406,79.575 101.525,79.575 103.06,78.04 103.06,75.165 103.84,74.385 DD19.2@103.84,70.45
DE_ISO: DD19.3 DD21.2 DD21.3 R103.2 | length 18.3
  Bottom Layer, Bottom w0.6: R103.2@98.45,62.925 98.45,61.838 98.613,61.675 101.3,61.675 ; DD19.3@101.3,64.1 101.3,61.675 ; DD21.3@101.6,57.05 DD21.2@101.6,58.32 104.495,58.32 105.55,59.375 105.55,61.1 104.975,61.675 101.3,61.675
EN: DD2.4 DD2.5 DD9.1 DD9.8 DD11.1 | length 99.9
  Top Layer, TOP w0.381: DD9.1@77.299,116.492 DD9.8@77.299,122.334 ; DD9.1@77.315,116.492 77.315,113.614 80.256,110.673 v1(80.379,110.673) ; v1@80.411,110.498 80.411,92.911 79.095,91.595 79.095,79.455 80.166,78.384 80.166,76.51 80.159,76.504 80.159,60.423 80.423,60.159 90.325,60.159 91.001,60.836 91.001,61.334 91.151,61.484 DD11.1@91.99,61.484 ; v1(86.489,111.935) 86.49,112.665 89.363,115.538 89.363,118.737 89.586,118.961 93.998,118.961 94.221,118.737 DD2.4@94.221,116.634 DD2.5@95.491,116.634 DD2.5@95.496,116.638
  Bottom Layer, Bottom w0.381: v1(80.379,110.673) v1@80.553,110.673 ; v1@80.553,110.672 84.297,110.672 85.441,111.816 86.371,111.816 v1(86.489,111.935)
EN_INV: DD2.6 DD14.3 DD14.5 DD14.9 DD14.11 DD15.2 DD15.5 DD15.11 | length 110.1
  Top Layer, TOP w0.381: v1(109.75,87.625) 109.868,87.507 109.868,86.917 111.501,85.285 115.654,85.285 116,85.63 116,86.775 116.875,87.65 116.875,88 ; DD14.9@116.18,90.659 116.18,88.695 116.875,88 ; DD14.5@117.45,95.739 117.407,95.781 117.407,99.116 v1(117.365,99.159) 119.391,99.159 119.99,98.56 DD14.3@119.99,95.739 ; DD14.11@118.72,90.659 118.75,90.628 118.75,88.8 117.95,88 116.875,88
  Top Layer, TOP w0.5: v1(95.5,119.1) 95.596,119.004 96.321,119.004 96.761,118.564 DD2.6@96.761,116.634
  Bottom Layer, Bottom w0.381: v1(95.5,119.1) 96.742,117.859 108.206,117.859 108.29,117.775 ; DD15.2@102.435,128.189 105.09,128.189 ; DD15.5@102.435,131.999 102.436,132 104.575,132 105.09,131.485 105.09,130.675 ; DD15.11@107.515,130.729 105.143,130.729 105.09,130.675 ; v1(109.75,87.625) 108.1,87.625 105.8,89.925 105.8,95.202 107.575,96.977 107.575,99.109 108.29,99.823 ; v1(117.365,99.159) 117.348,99.159 116.599,98.409 109.703,98.409 108.29,99.823 ; 105.09,128.189 105.09,130.675 ; 105.09,128.189 105.09,126.085 108.29,122.885 108.29,117.775 ; 108.29,99.823 108.29,117.775
  other v4: 108.3,102.525
Faza: L3.4 pad.7@146,141.65 pad.7@157.5,153 X2.18 X2.36 | length 28.5
  Top Layer, TOP w1.016: L3.4@149.225,162.05 149.225,159.05 155.225,153.05 pad.7@157.5,153.05
  Top Layer, TOP w1.5: pad.7@146,141.65 146.249,141.401 149.058,141.401 151.3,139.159 X2.18@151.49,139.159
  Bottom Layer, Bottom w1.5: X2.18@151.49,139.159 X2.36@159.69,139.159
GEN_OUT: DD1.1 R25.1 | length 17.7
  Top Layer, TOP w0.279: R25.1@89.039,112.234 87.858,112.234 87.615,111.99 87.615,99.855 88.222,99.247 88.358,99.111 DD1.1@91.37,99.111
GND: BAT1.Minus C14.1 C17.1 C18.1 C21.2 C22.2 C23.2 C24.2 C25.2 C26.1 C27.2 C31.1 C32.2 C33.1 C34.1 C35.1 C36.1 C37.1 C38.1 C40.1 C41.2 C44.Minus C46.2 C48.1 C49.1 C50.2 C52.2 C53.2 C55.1 C56.Minus C57.Minus C58.Minus C59.2 C65.2 C67.Minus C68.2 C70.2 DA5.GND DA6.GND DD1.10 DD1.27 DD1.49 DD1.74 DD1.99 DD2.7 DD4.1 DD4.2 DD4.3 DD4.4 DD4.7 DD5.2 DD6.8 DD7.GND DD8.1 DD9.3 DD10.4 DD11.3 DD12.4 DD13.4 DD14.7 DD15.7 DD16.4 DD18.4 DD22.2 pad.Minus R26.1 R35.1 R75.1 R77.1 R79.1 R87.1 R91.2 R92.2 R93.2 R94.2 R95.2 R96.2 VD5.2 VD9.2 VD10.2 VD12.1 VD13.1 VD14.1 XS1.4 XS1.6 XS1.8 XS1.10 XS1.12 XS1.14 XS1.16 XS1.18 XS1.20 | length 197
  Top Layer, TOP w0.4: v1(112.725,96.15) 114.76,96.15 114.91,96 DD14.7@114.91,95.739
  Top Layer, TOP w0.5: v1(61.775,125.35) 61.775,126.825 v1(65.525,130.575) ; VD12.1@65.615,92.024 65.615,90.91 66.525,90 v1(75,90) ; v1@79.839,114.84 DD9.3@79.839,116.492 ; v1(81.39,71.474) 81.485,71.569 81.485,72.135 81.725,72.375 81.725,73.219 C26.1@81.74,73.234 ; C48.1@82.815,66.209 83.115,66.209 83.365,66.459 83.365,66.982 83.657,67.275 84.76,67.275 85.281,67.797 86.262,67.797 v1(86.358,67.892) ; v1(90.1,67.5) 92.7,67.5 92.8,67.4 ; C36.1@95.209,80.4 95.209,81.879 95.585,82.255 v1(95.585,82.39) ; DD18.4@102.54,69.35 115.098,69.35 pad.Minus@115.189,69.259 ; C17.1@104.09,121.118 104.14,121.168 v1(104.14,123.084)
  Top Layer, TOP w0.508: C49.1@85.864,124.538 86.11,124.292 86.11,123.707 86.408,123.41 87.89,123.41 v1(87.925,123.375) 87.925,121.453 C18.1@87.915,121.443 ; DD11.3@91.99,64.034 92.038,64.083 93.602,64.083 93.9,64.38 93.9,66.3 92.8,67.4 ; R35.1@92.114,107.084 93.763,107.084 94.054,107.375 v1(94.189,107.375) 97.208,107.375 VD5.2@97.341,107.509 ; v1@94.214,107.509 R26.1@94.214,110.034 ; DD2.7@98.031,116.634 v1@98.031,118.931 ; v1@107.102,119.159 107.525,119.582 C32.2@107.525,120.816 ; DD4.4@109.124,114.059 109.1,114.083 109.1,115.625 109.975,116.5 110.4,116.5 ; DD4.3@110.394,114.059 110.394,116.494 110.4,116.5 ; C27.2@110.739,104.784 110.985,105.03 110.985,105.86 111.65,106.525 111.65,108.203 DD4.7@111.664,108.217 DD4.2@111.664,114.059 111.664,116.486 111.65,116.5 ; DD4.1@112.934,114.059 112.934,116.466 112.9,116.5 ; v1(114.82,115.164) 114.82,115.23 113.55,116.5 112.9,116.5 ; 110.4,116.5 111.65,116.5 ; 111.65,116.5 112.9,116.5
  Bottom Layer, Bottom w0.4: DD6.8@116.085,97.419 118.219,97.419 119.431,98.631 C33.1@119.431,99.834 ; DD16.4@124.85,62.65 DD16.4@124.883,62.683 ; C59.2@124.883,66.042 C59.2@124.916,66.075
  Bottom Layer, Bottom w0.5: v1(61.775,125.35) 61.775,124.025 62.45,123.35 62.55,123.35 ; R75.1@64.875,123.35 62.55,123.35 ; VD14.1@65.615,66.284 65.648,66.25 68.425,66.25 69.25,67.075 69.25,69.65 71.074,71.474 v1(81.39,71.474) ; VD13.1@65.615,117.919 64.031,117.919 62.55,119.4 62.55,123.35 ; v1(75,90) 75,88.575 77.35,86.225 90.1,86.225 v1(91.025,85.3) ; v1(95.585,82.39) 96.935,82.39 97.324,82.001 C31.1@97.324,80.559 ; C21.2@96.004,95.72 96.615,95.109 v1(96.615,94.034) ; C25.2@101.888,96.157 101.943,96.157 v1(103.275,94.825) ; v1(101.972,91.801) 102,91.772 102,90.925 102.64,90.285 C24.2@102.64,90.009 ; DD15.7@102.435,134.539 102.49,134.539 DD15.7@102.59,134.639 ; C68.2@107.225,86.525 108.684,86.525 109.15,86.059 109.15,85.759 109.4,85.509 R93.2@109.7,85.509 109.709,85.5 110.875,85.5 111.5,84.875 R92.2@112.775,84.875 113.025,84.625 113.857,84.625 113.925,84.557 R91.2@113.925,82.65
  Bottom Layer, Bottom w0.508: C22.2@97.325,88.15 v1(97.325,90.025) 97.325,91.891 C23.2@97.334,91.9
  Bottom Layer, Bottom w0.8: DA6.GND@58.85,148.35 58.862,148.363 58.862,151.412 C70.2@58.875,151.425 ; C70.2@58.85,151.425 58.862,151.438 58.862,153.763 C65.2@58.875,153.775 ; v1(70.875,142.325) C34.1@70.875,144.675 ; C35.1@70.887,140.613 v1@70.887,142.312 ; C37.1@72.625,155.084 72.629,155.088 72.629,157.956 DD7.GND@72.632,157.96 ; DA5.GND@87.15,156.775 v1(89.675,156.775) ; v1(90.425,148.3) C40.1@90.425,150.416 C40.1@90.425,150.441 ; R79.1@92.89,131.468 R77.1@95.465,131.468 ; DD16.4@124.883,62.683 C59.2@124.883,66.042
  other v1: 85.875,78.2 102.8,81.925 79.839,114.84 98.031,119.081 107.087,119.174 110.75,135.2
  other v3: 126.4,76.775
GND_24V: C42.1 C43.2 DD8.3 R66.1 R70.1 R80.1 R98.1 | length 142.6
  Top Layer, TOP w0.5: v1(124.675,42.775) 127.675,42.775 128.275,42.175 146.85,42.175 147.5,42.825 147.5,46.9 154.8,54.2 154.8,115.95 154.175,116.575 146.05,116.575 142.525,120.1 137.45,120.1 v1(136.775,120.775) ; C43.2@131.925,120.79 v1@136.775,120.79
  Top Layer, TOP w1: DD8.3@123.14,117.857 123.175,117.892 R98.1@123.175,125.05
  Bottom Layer, Bottom w0.5: R80.1@124.621,44.671 124.675,44.617 v1(124.675,42.775) ; R70.1@136.768,123.584 R70.1@136.772,123.581 ; R66.1@136.768,129.659 R66.1@136.777,129.65 ; v1@136.772,120.778 v1(136.775,120.775)
  Bottom Layer, Bottom w1: DD8.3@123.14,117.857 123.14,119.965 123.539,120.364 123.539,122.026 C42.1@123.531,122.034 ; v1@136.772,120.778 R70.1@136.772,123.581 ; R66.1@136.777,129.65 v1(138.675,129.65)
GND_ISO: C61.2 DD19.4 DD20.4 DD21.5 DD22.3 R40.1 | length 22.8
  Top Layer, TOP w0.6: v1(108.625,61.3) 108.625,62.7 108.85,62.925 108.85,64.175 R40.1@108.825,64.2
  Bottom Layer, Bottom w0.6: v1(94.2,52.875) 94.2,53.119 94.808,53.727 94.808,55.73 94.858,55.78 DD21.5@95.758,55.78 ; DD19.4@103.84,64.1 103.89,64.15 103.89,65.94 104.525,66.575 108.925,66.575 109.54,65.96 DD20.4@109.54,64.05 109.54,62.3 108.625,61.385 v1(108.625,61.3)
  Bottom Layer, Bottom w1: C61.2@112.2,52.384 112.202,52.382 114.873,52.382 DD22.3@114.875,52.38
GND_ISO_GO: R38.1 R39.1 R40.2 R83.1 X1.3 X1.6 | length 44.6
  Top Layer, TOP w1: R40.2@105.396,64.2 105.396,61.829 105.925,61.3 105.925,58.025 R38.1@107.95,56 108.09,55.86 X1.3@108.09,52.159 X1.6@108.09,43.959
  Bottom Layer, Bottom w1: X1.6@108.09,43.959 110.723,41.325 126.529,41.325 127.475,42.271 R83.1@127.475,44.675
GNDA: C2.1 C3.1 C5.1 C6.1 C8.1 C9.1 C10.2 C12.1 C13.1 C28.1 C29.1 C30.1 C54.1 C71.1 C72.Minus DA1.2 DA2.2 DA3.2 DA4.2 DD1.19 DD1.20 R23.1 R87.2 | length 100.3
  Top Layer, TOP w0.279: C30.1@82.765,84.8 81.575,84.8 81.2,85.175 81.2,87.375 81.95,88.125 87.25,88.125 88.736,89.611 ; DD1.20@91.37,89.611 88.736,89.611 ; DD1.19@91.37,90.111 89.236,90.111 88.736,89.611
  Top Layer, TOP w0.3: DA4.2@87.61,46.784 v1(89.14,46.784)
  Top Layer, TOP w0.381: v1(73.16,51.534) 73.16,53.674 73.383,53.897 DA3.2@74.475,53.897 ; v1(73.25,103.025) 73.275,103.05 73.275,105.225 73.539,105.489 DA1.2@74.47,105.489 ; DA2.2@74.51,79.669 73.619,79.669 73.23,79.28 v1(73.23,77.349) v1@78.974,77.349 ; v1@81.125,48.944 v1(81.115,48.934) 81.234,48.934 82.35,50.05 C10.2@82.35,50.85 84.244,50.85 85.001,50.094 R23.1@85.001,49.794 ; v1(89.14,46.784) 89.14,50.965 89.74,51.565 C13.1@89.74,52.675
  Top Layer, TOP w0.5: v1(82.565,77.609) 82.575,77.619 82.575,79.698 C28.1@82.565,79.709 ; C28.1@82.565,79.784 82.556,79.793 C29.1@82.556,82.159 82.556,84.491 C30.1@82.765,84.7 ; C12.1@87.17,43.814 87.215,43.859 v1(89.14,43.859)
  Bottom Layer, Bottom w0.3: v1(79.075,77.4) 79.264,77.4 79.489,77.625 82.548,77.625 v1(82.565,77.609)
  Bottom Layer, Bottom w0.381: C5.1@69.999,78.729 69.999,77.301 71.016,76.284 ; C2.1@70.069,104.599 70.069,103.267 70.292,103.044 73.231,103.044 v1(73.25,103.025) 73.25,101.05 73.856,100.444 C3.1@73.856,98.034 ; C8.1@70.125,52.959 70.125,51.751 70.341,51.534 v1(73.16,51.534) 73.16,49.29 74.1,48.35 75.839,48.35 C9.1@75.906,48.284 ; C6.1@71.016,74.75 71.016,76.284 ; v1(73.23,77.349) 73.23,76.505 73.009,76.284 71.016,76.284
  Bottom Layer, Bottom w0.8: C72.Minus@59.675,118.919 59.675,116.7 61.075,115.3 v1(62.3,115.3)
  Bottom Layer, Bottom w1: C71.1@62.059,136.575 63.225,136.575 63.45,136.35 R87.2@63.45,133.95 C54.1@63.45,130.259
  other v1: 63.438,132.117
  other v3: 80,44
Graund: C63.1 C64.2 pad.0@157.39,161 R86.2 R99.1 | length 64.3
  Top Layer, TOP w1.5: C64.2@117.655,146.448 117.655,150.909 123.592,156.845 ; R86.2@127.412,151.25 127.412,153.025 ; R99.1@129.212,154.825 127.412,153.025 ; pad.0@157.39,161 156.658,161 153.135,164.523 125.715,164.523 123.592,162.4 123.592,156.845 ; 123.592,156.845 127.412,153.025
LED1.1: DD1.5 VD6.2 | length 42.8
  Top Layer, TOP w0.279: v1(81.69,96.434) 83.876,96.434 84.553,97.111 DD1.5@91.37,97.111
  Top Layer, TOP w0.381: v1(75.49,119.584) 74.559,118.653 74.559,112.877 78.106,109.33 78.106,97.417 v1(79.065,96.459)
  Bottom Layer, Bottom w0.381: v1@75.523,119.617 v1(75.49,119.584) 78.182,119.584 78.6,120.002 VD6.2@78.6,121.5 ; v1(79.065,96.459) v1@81.69,96.459
LED1.2: DD1.4 VD6.1 | length 40.9
  Top Layer, TOP w0.279: v1(81.69,98.259) 82.339,97.61 DD1.4@90.824,97.61
  Top Layer, TOP w0.381: v1(75.917,118.147) 75.904,118.134 75.763,118.134 75.54,117.911 75.54,113.71 79.101,110.149 79.101,98.37 v1(79.213,98.259)
  Bottom Layer, Bottom w0.381: v1(75.917,118.147) 75.931,118.134 79.653,118.134 80.35,118.831 VD6.1@80.35,121.5 ; v1(79.213,98.259) v1(81.69,98.259)